# Altium PCB {TEX137}_F2837x_controlCARD_R1.3_PCB_PADS.PcbDoc (part 1 of 6)
Units mil, origin at the board's own origin, x right, y up, seen from the top; angles counter-clockwise.
Board outline 4163.98 x 2011.3 mil, 10 copper layers (Primary Side, Inner Layer 2, Inner Layer 3, Inner Layer 4, Inner Layer 5, Inner Layer 6, Inner Layer 7, Inner Layer 8, Inner Layer 9, Secondary Side), stack 103.5 mil thick; 292 components, 317 nets, 1400 pads, 1032 vias.
Unrouted connection lines stored in the file: 106.
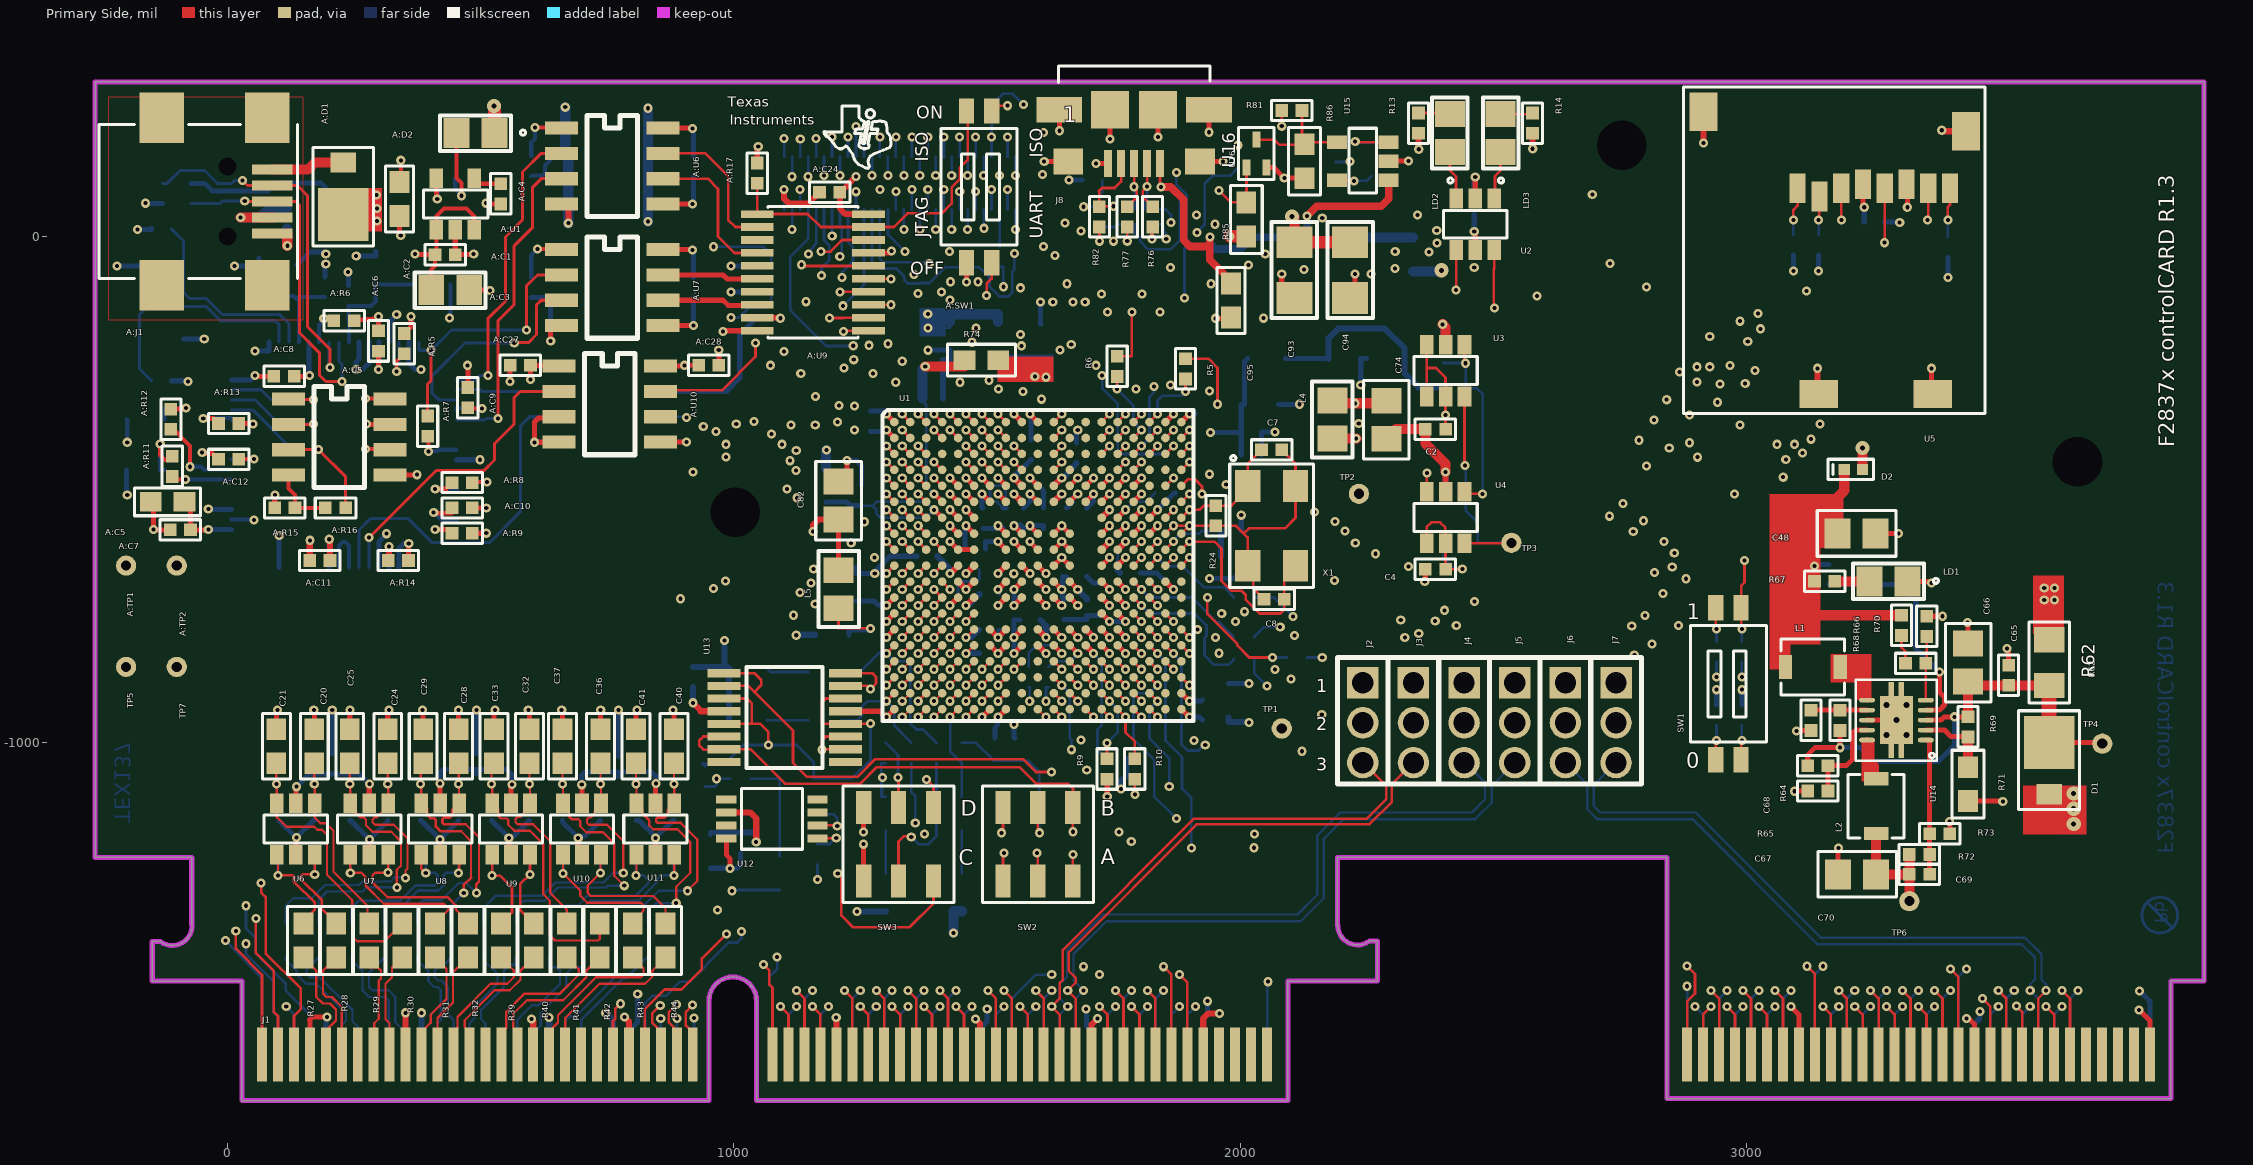
[diagram p0: Primary Side view]
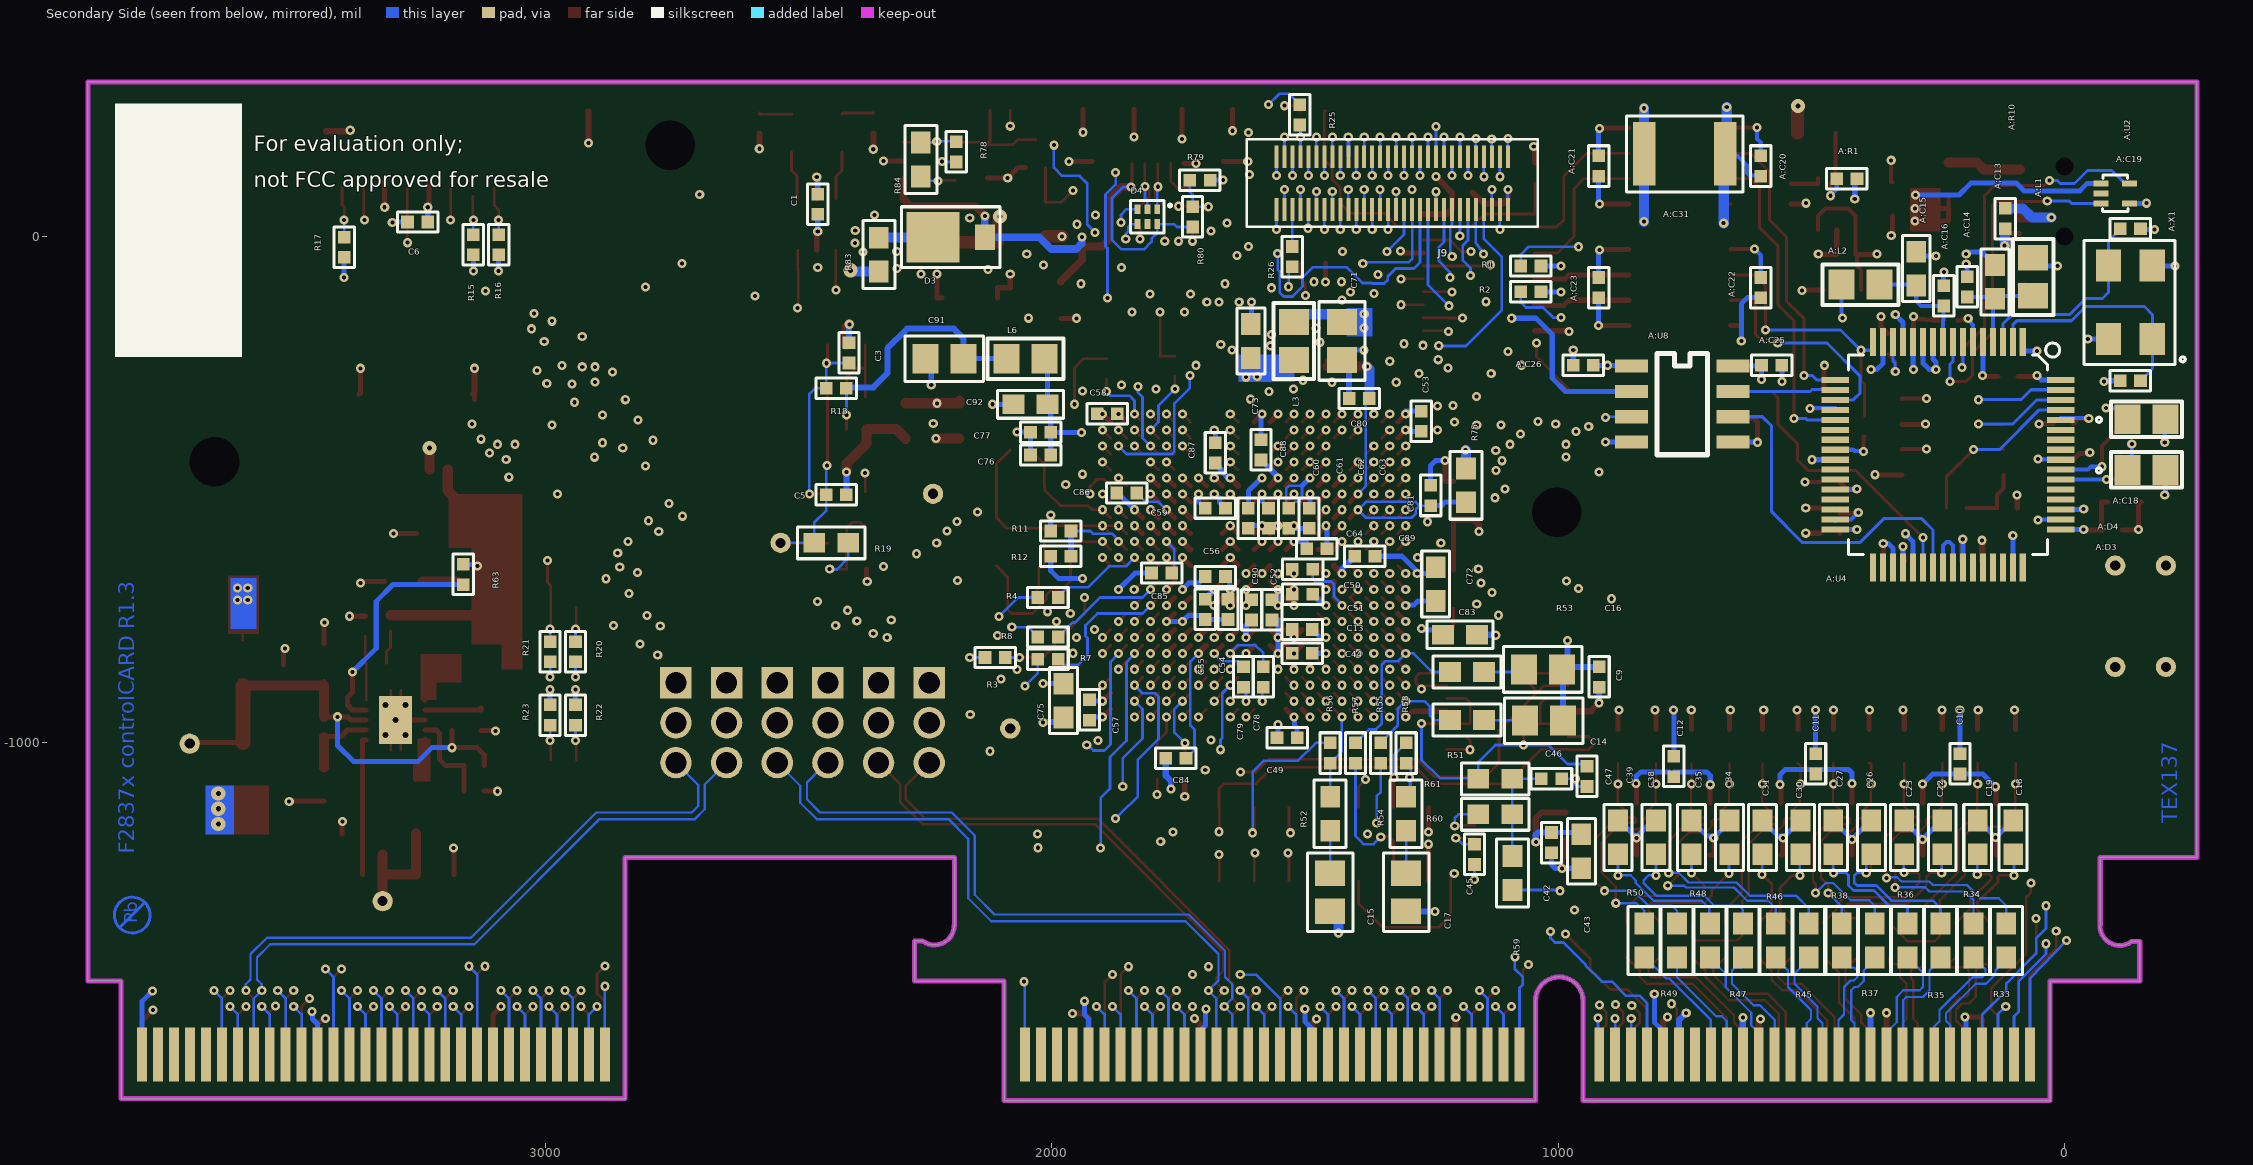
[diagram p1: Secondary Side view, seen from below]
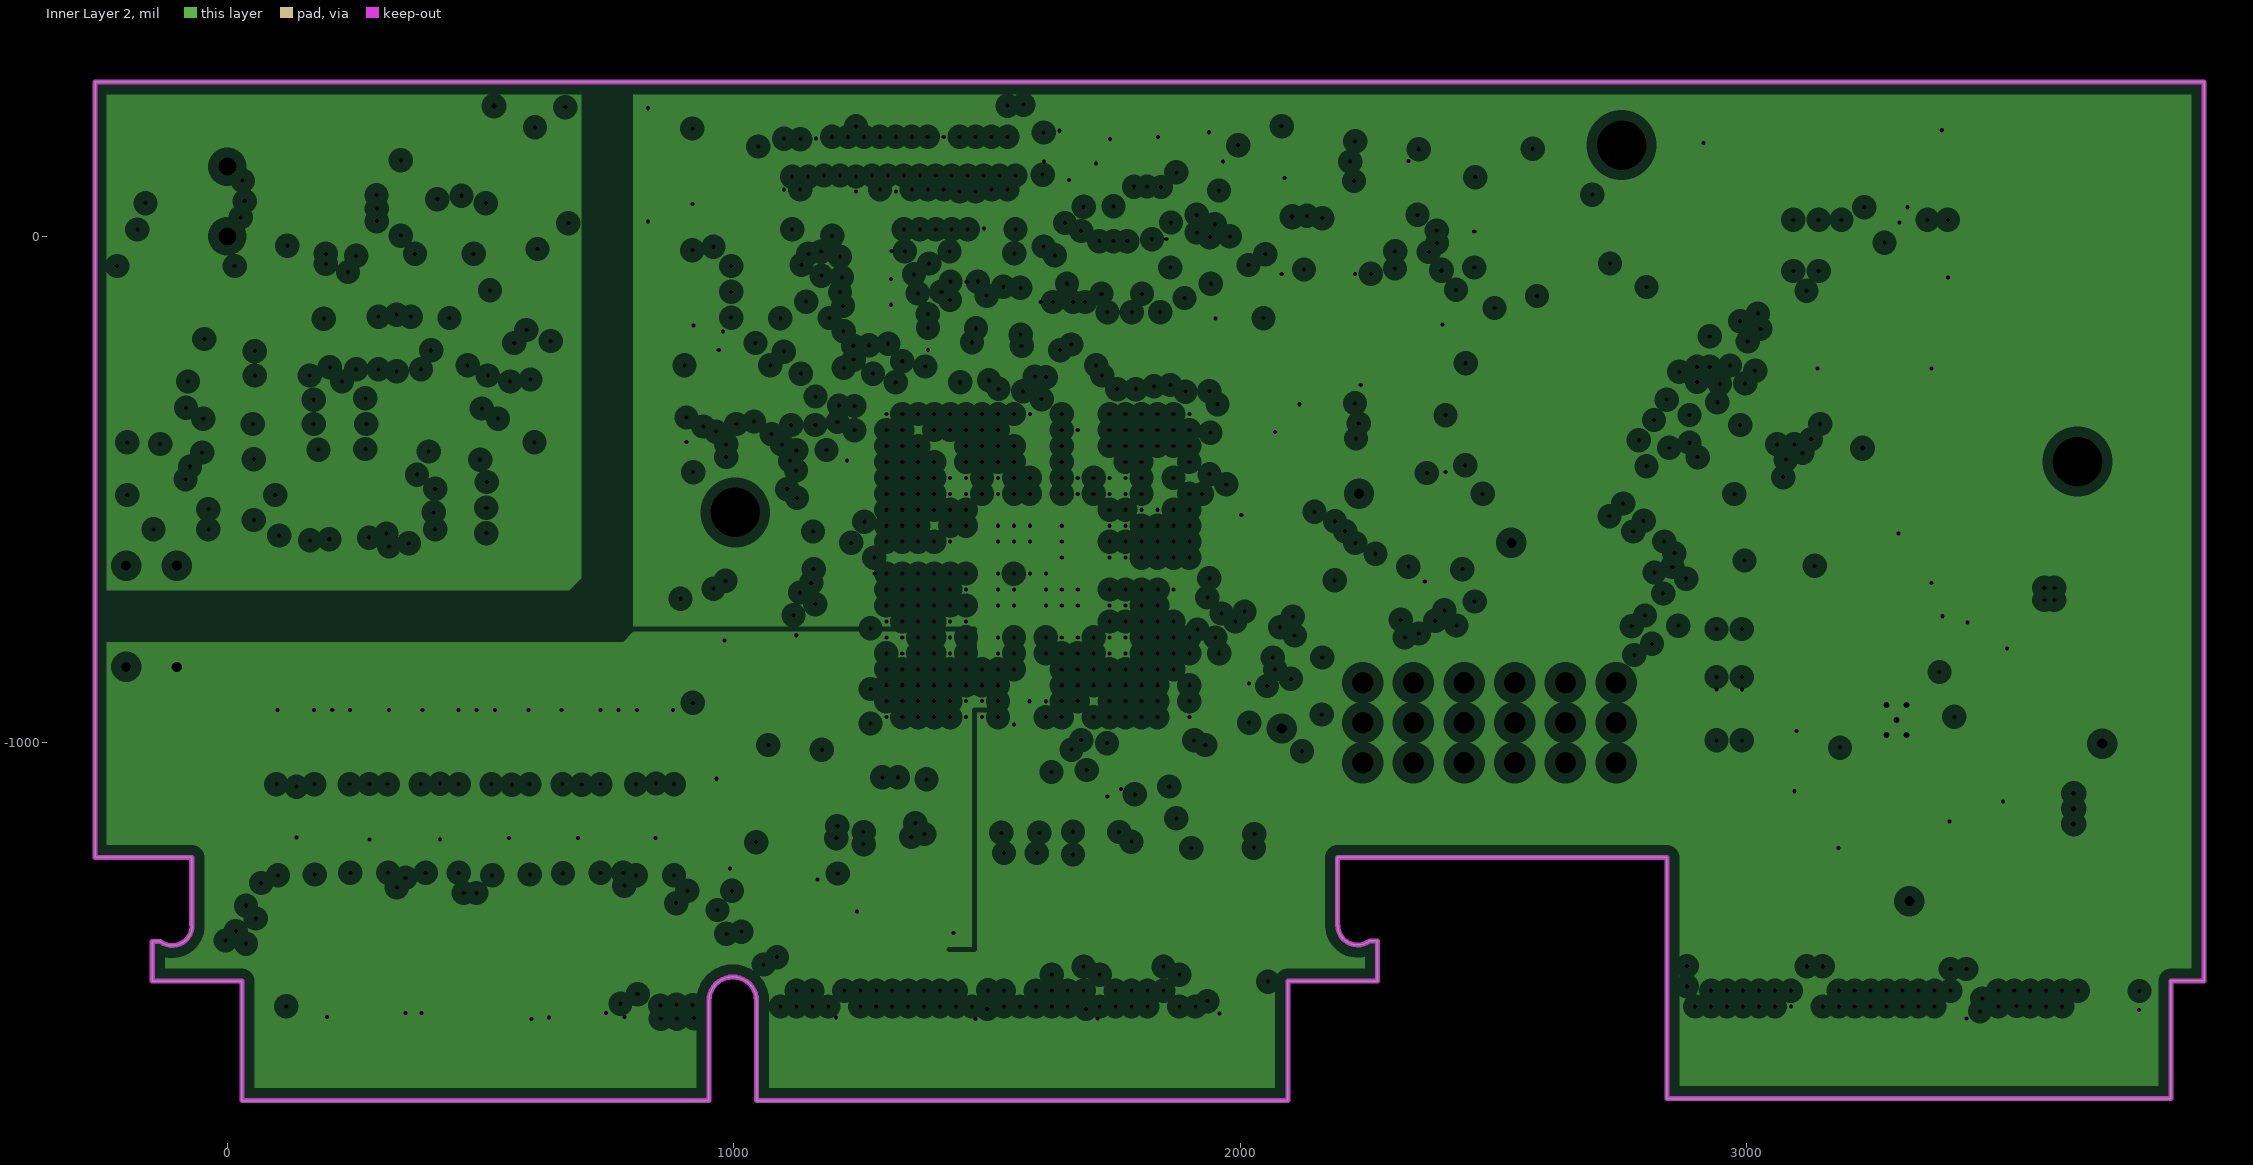
[diagram p2: Inner Layer 2, clearances drawn from the general rule]
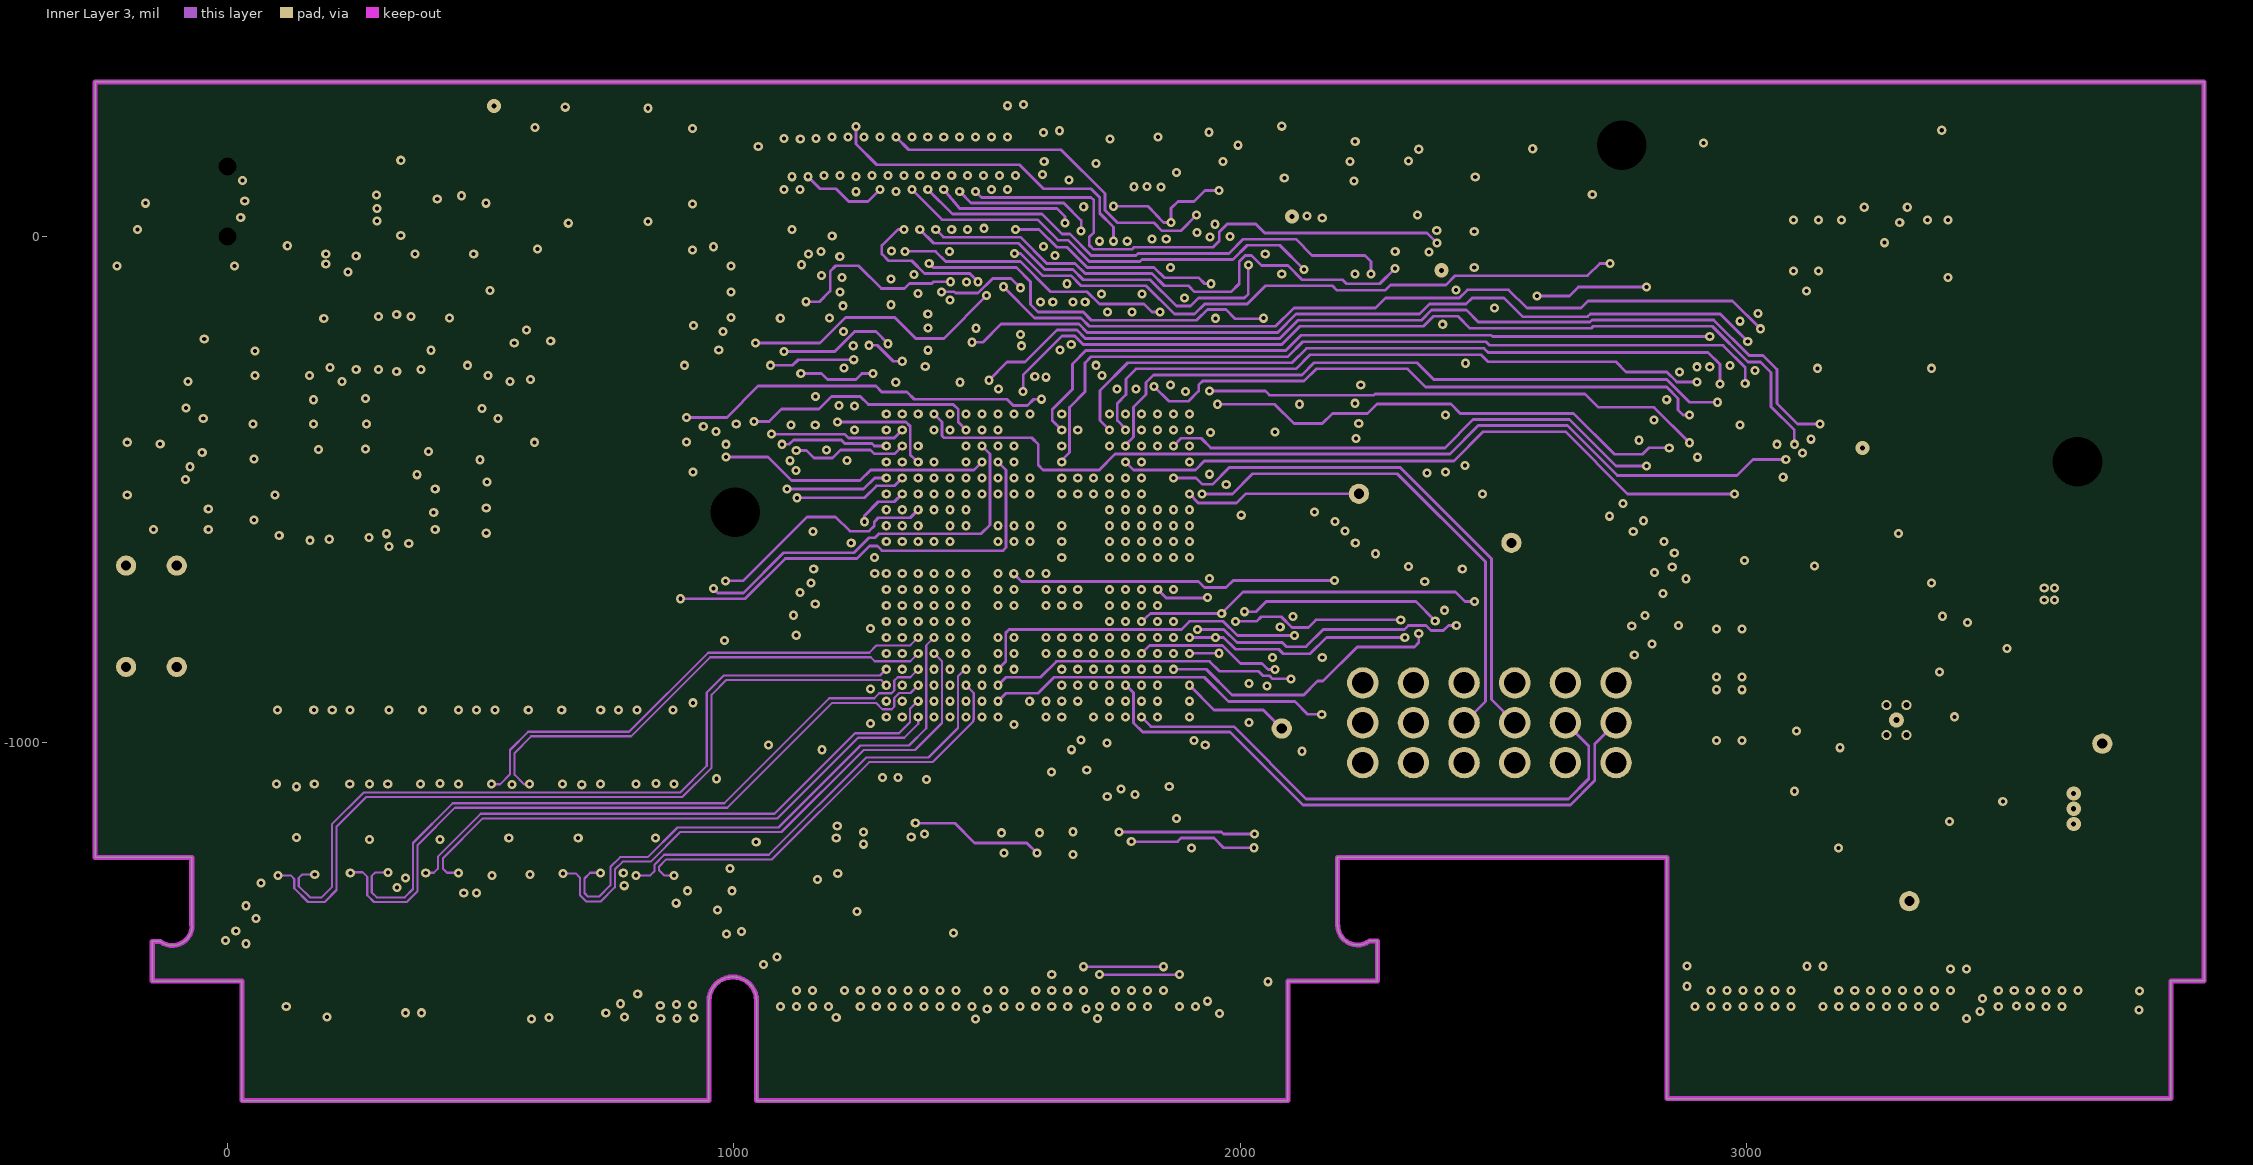
[diagram p3: Inner Layer 3]
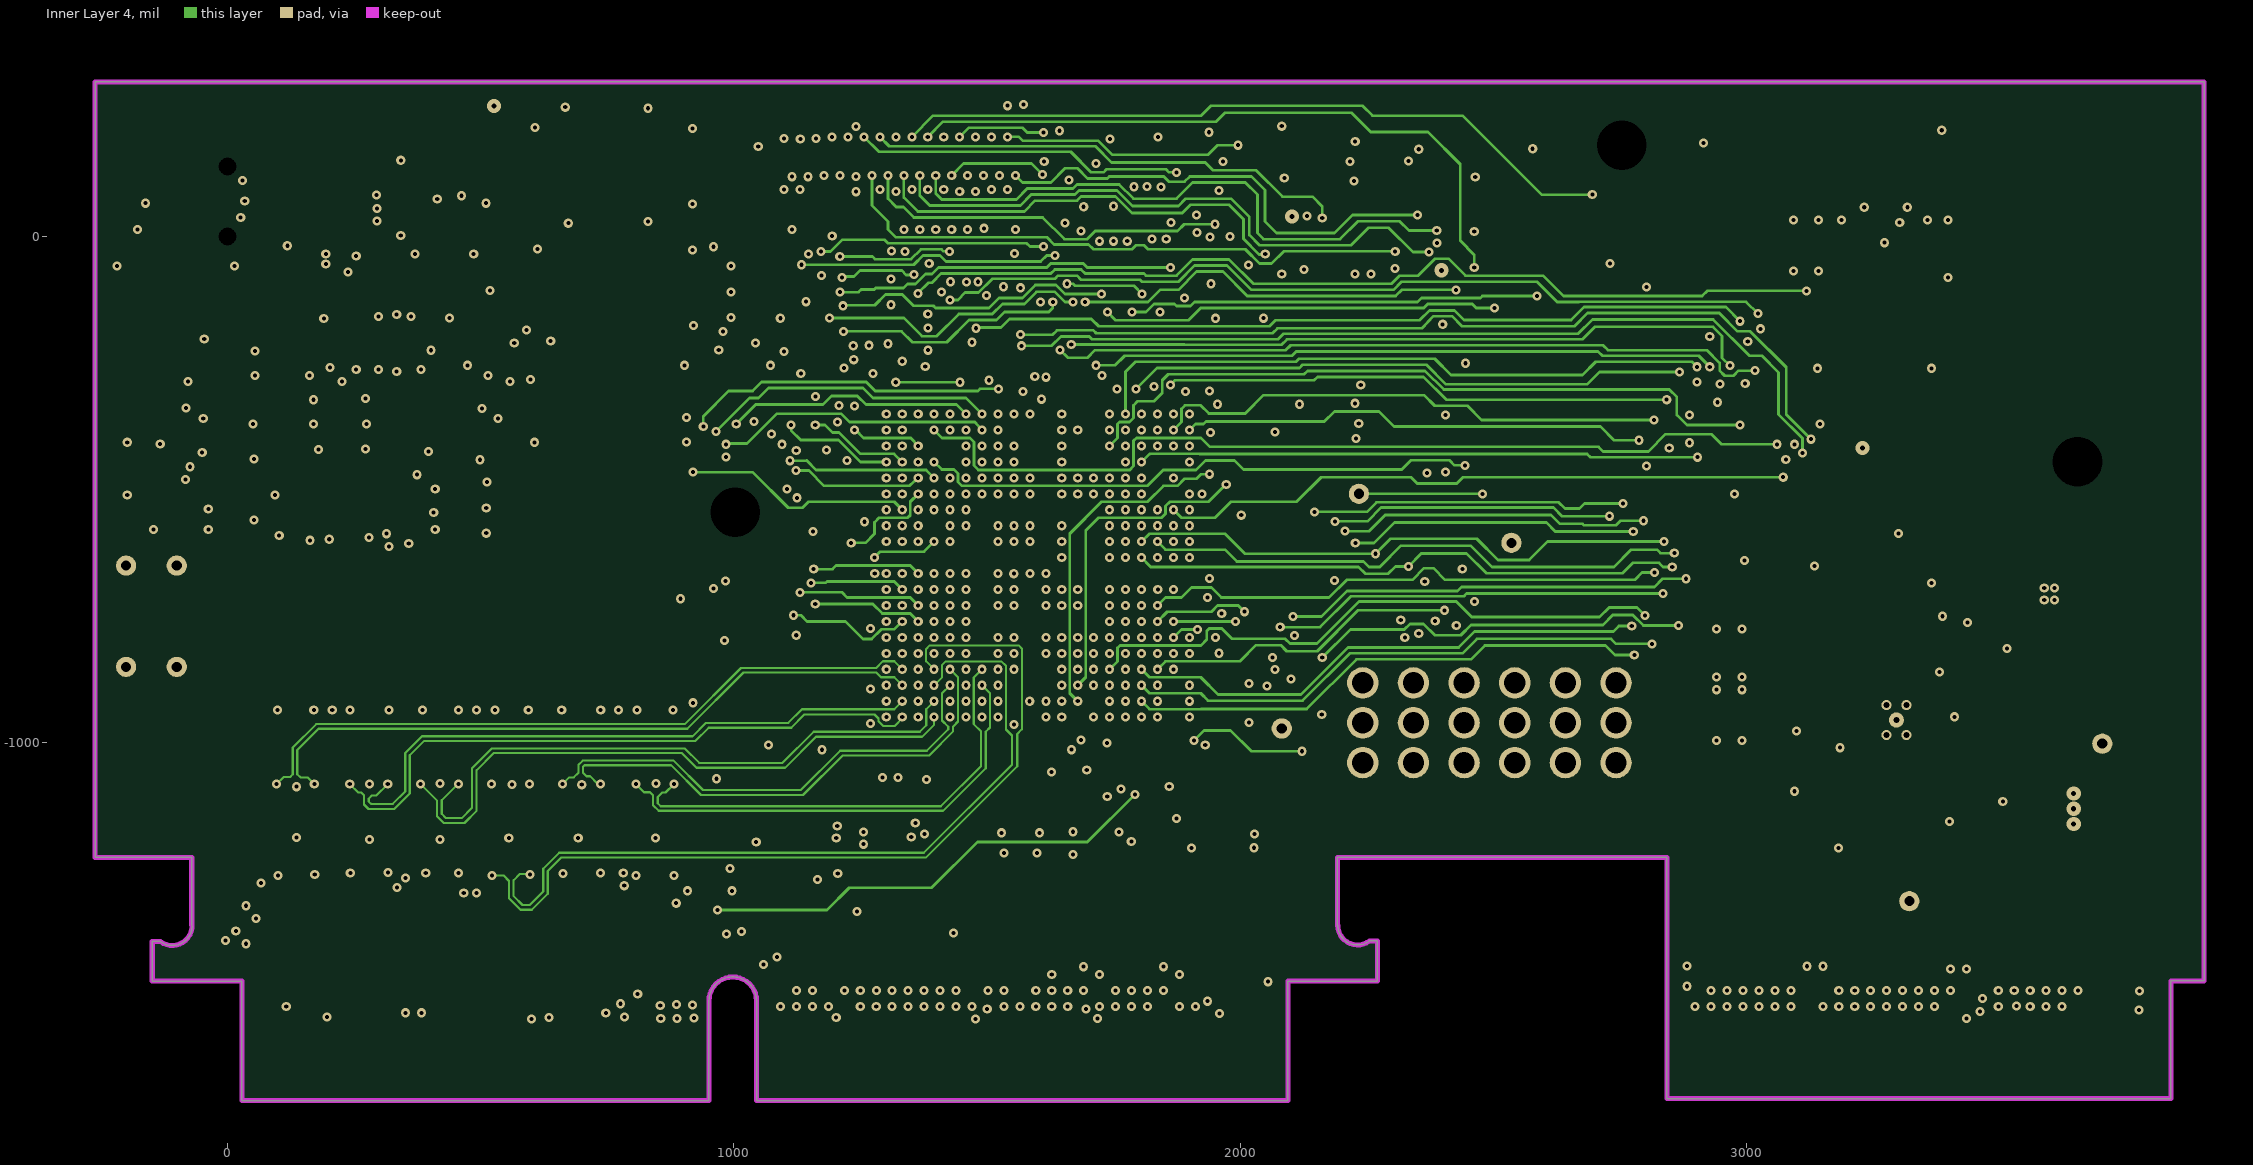
[diagram p4: Inner Layer 4]
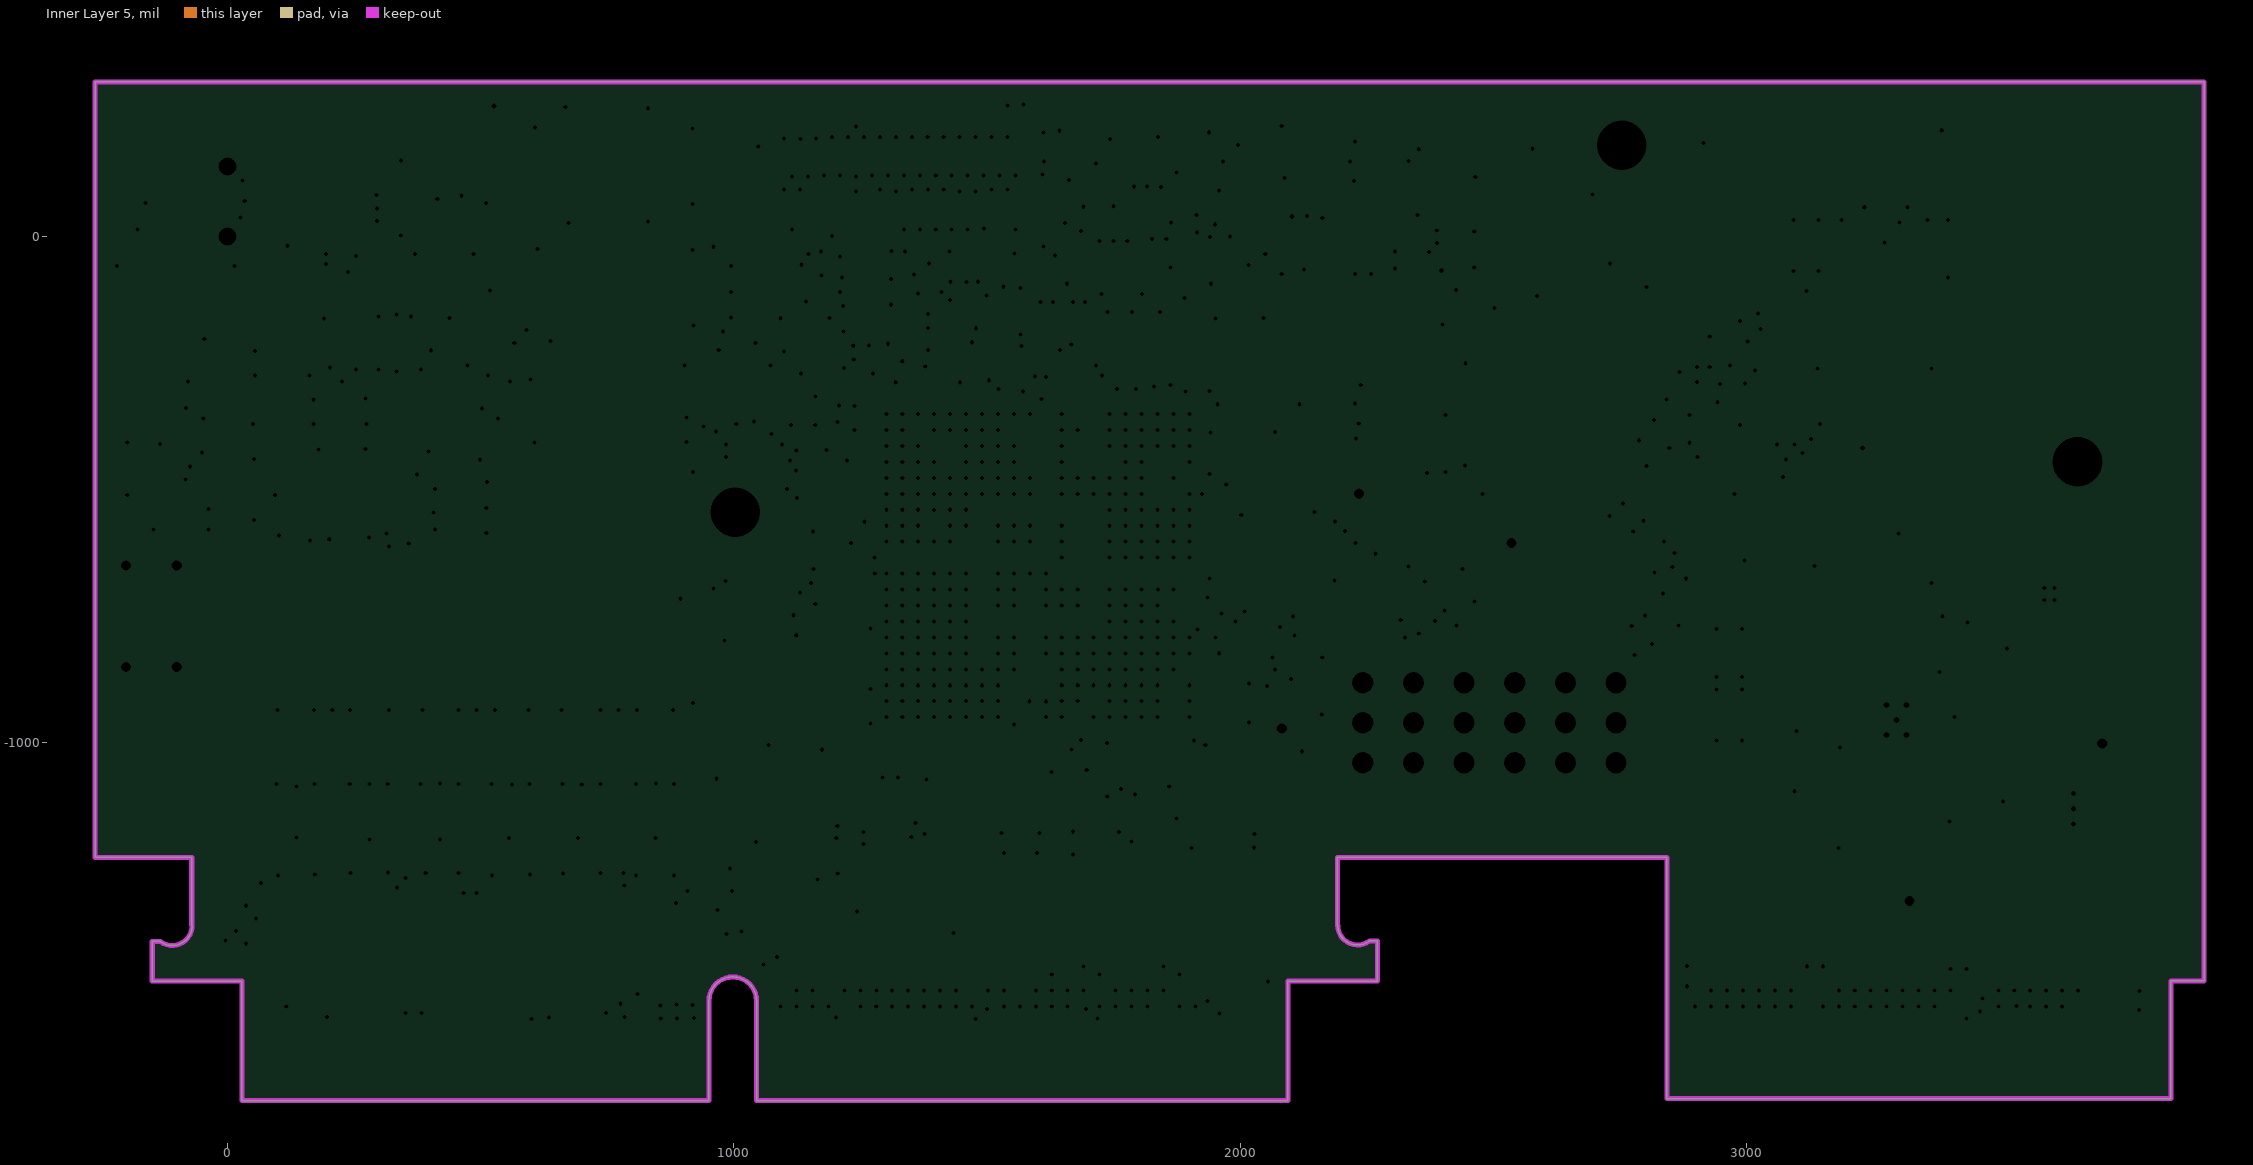
[diagram p5: Inner Layer 5, clearances drawn from the general rule]
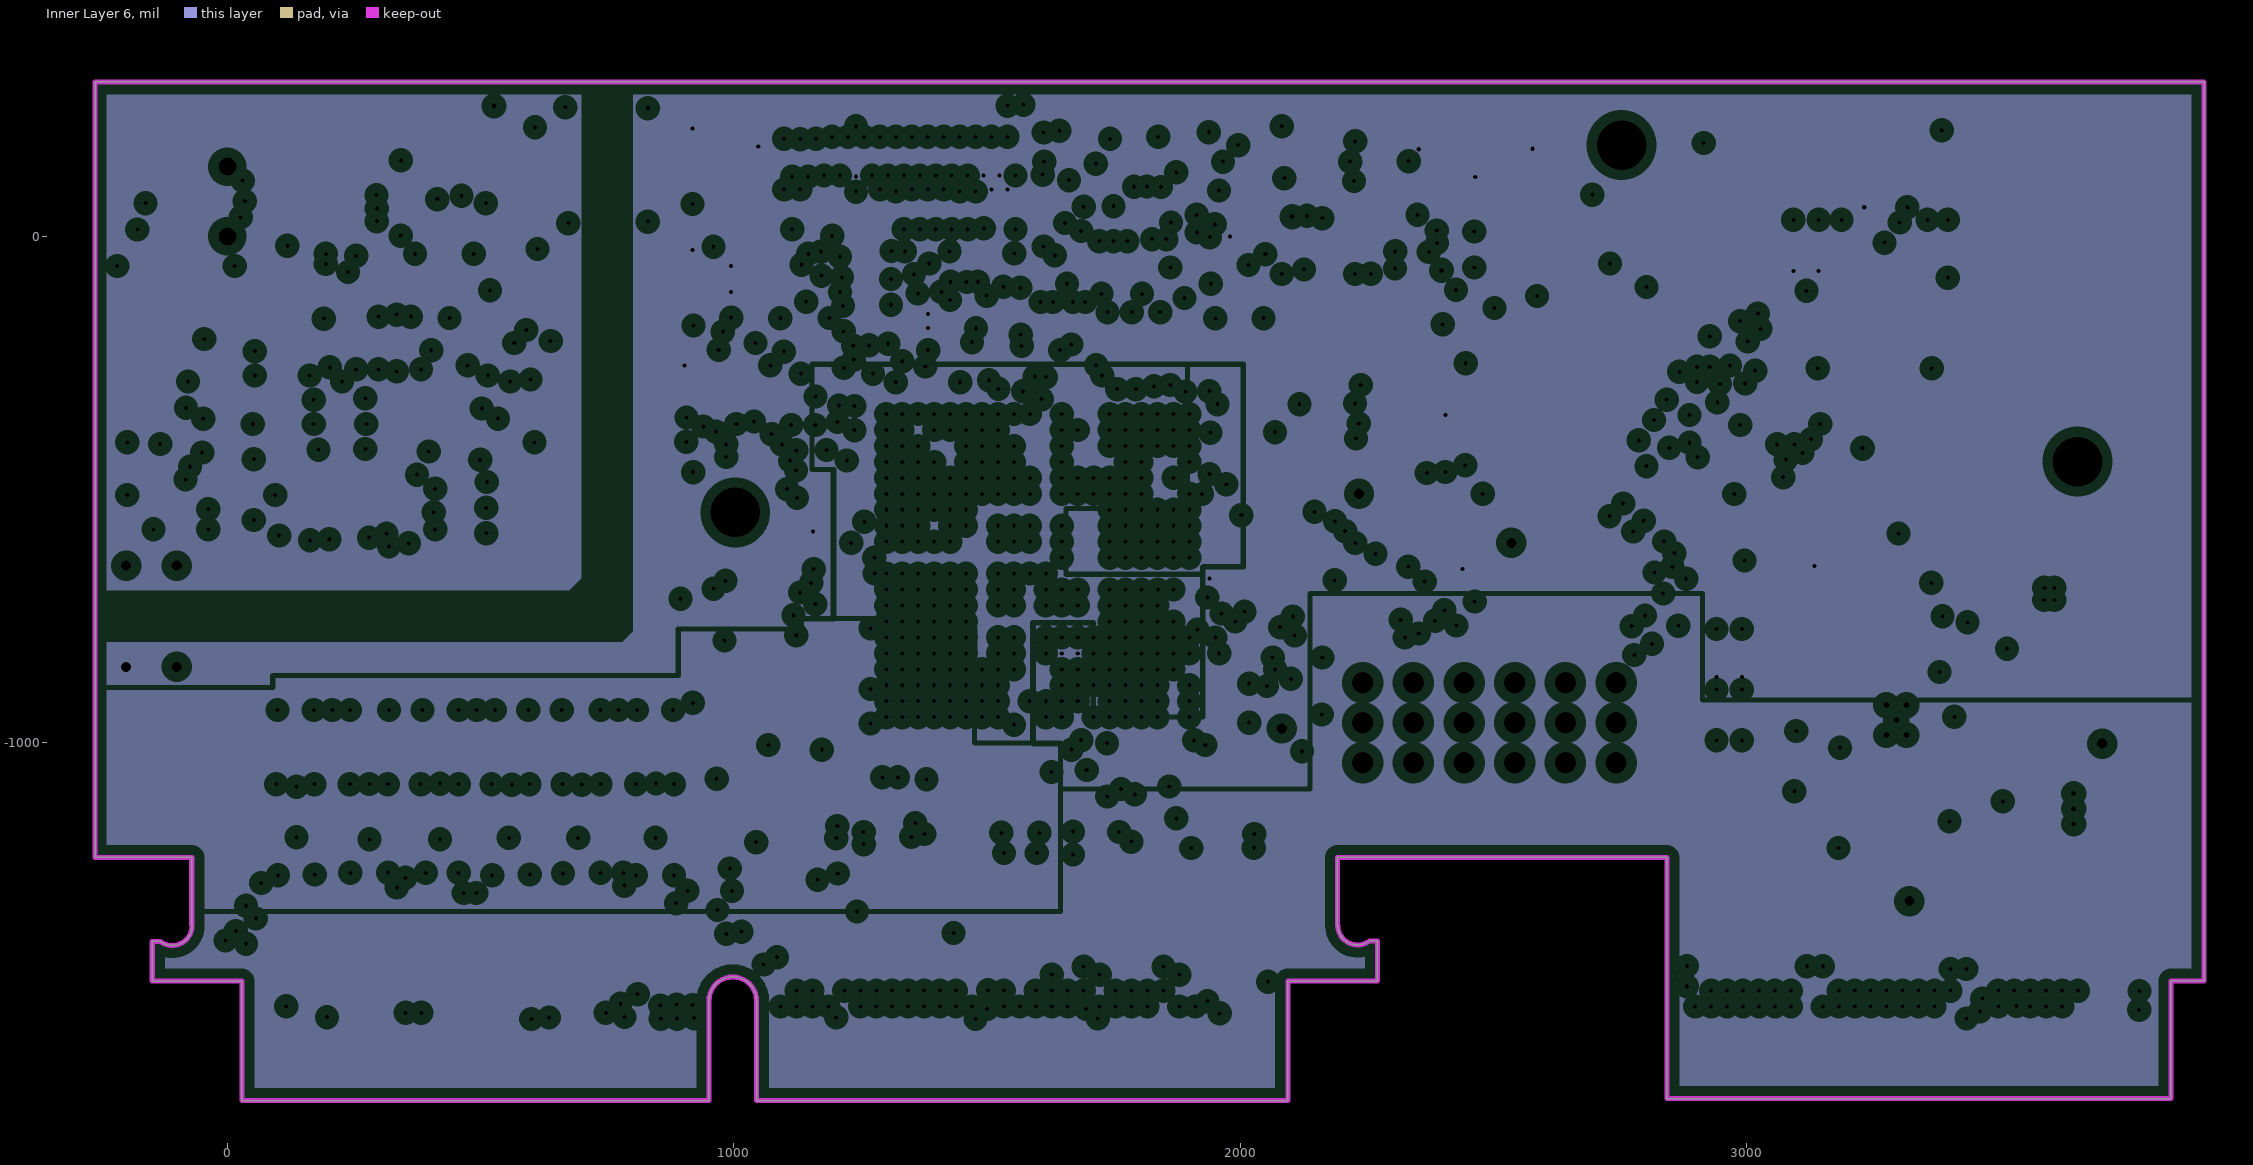
[diagram p6: Inner Layer 6, clearances drawn from the general rule]
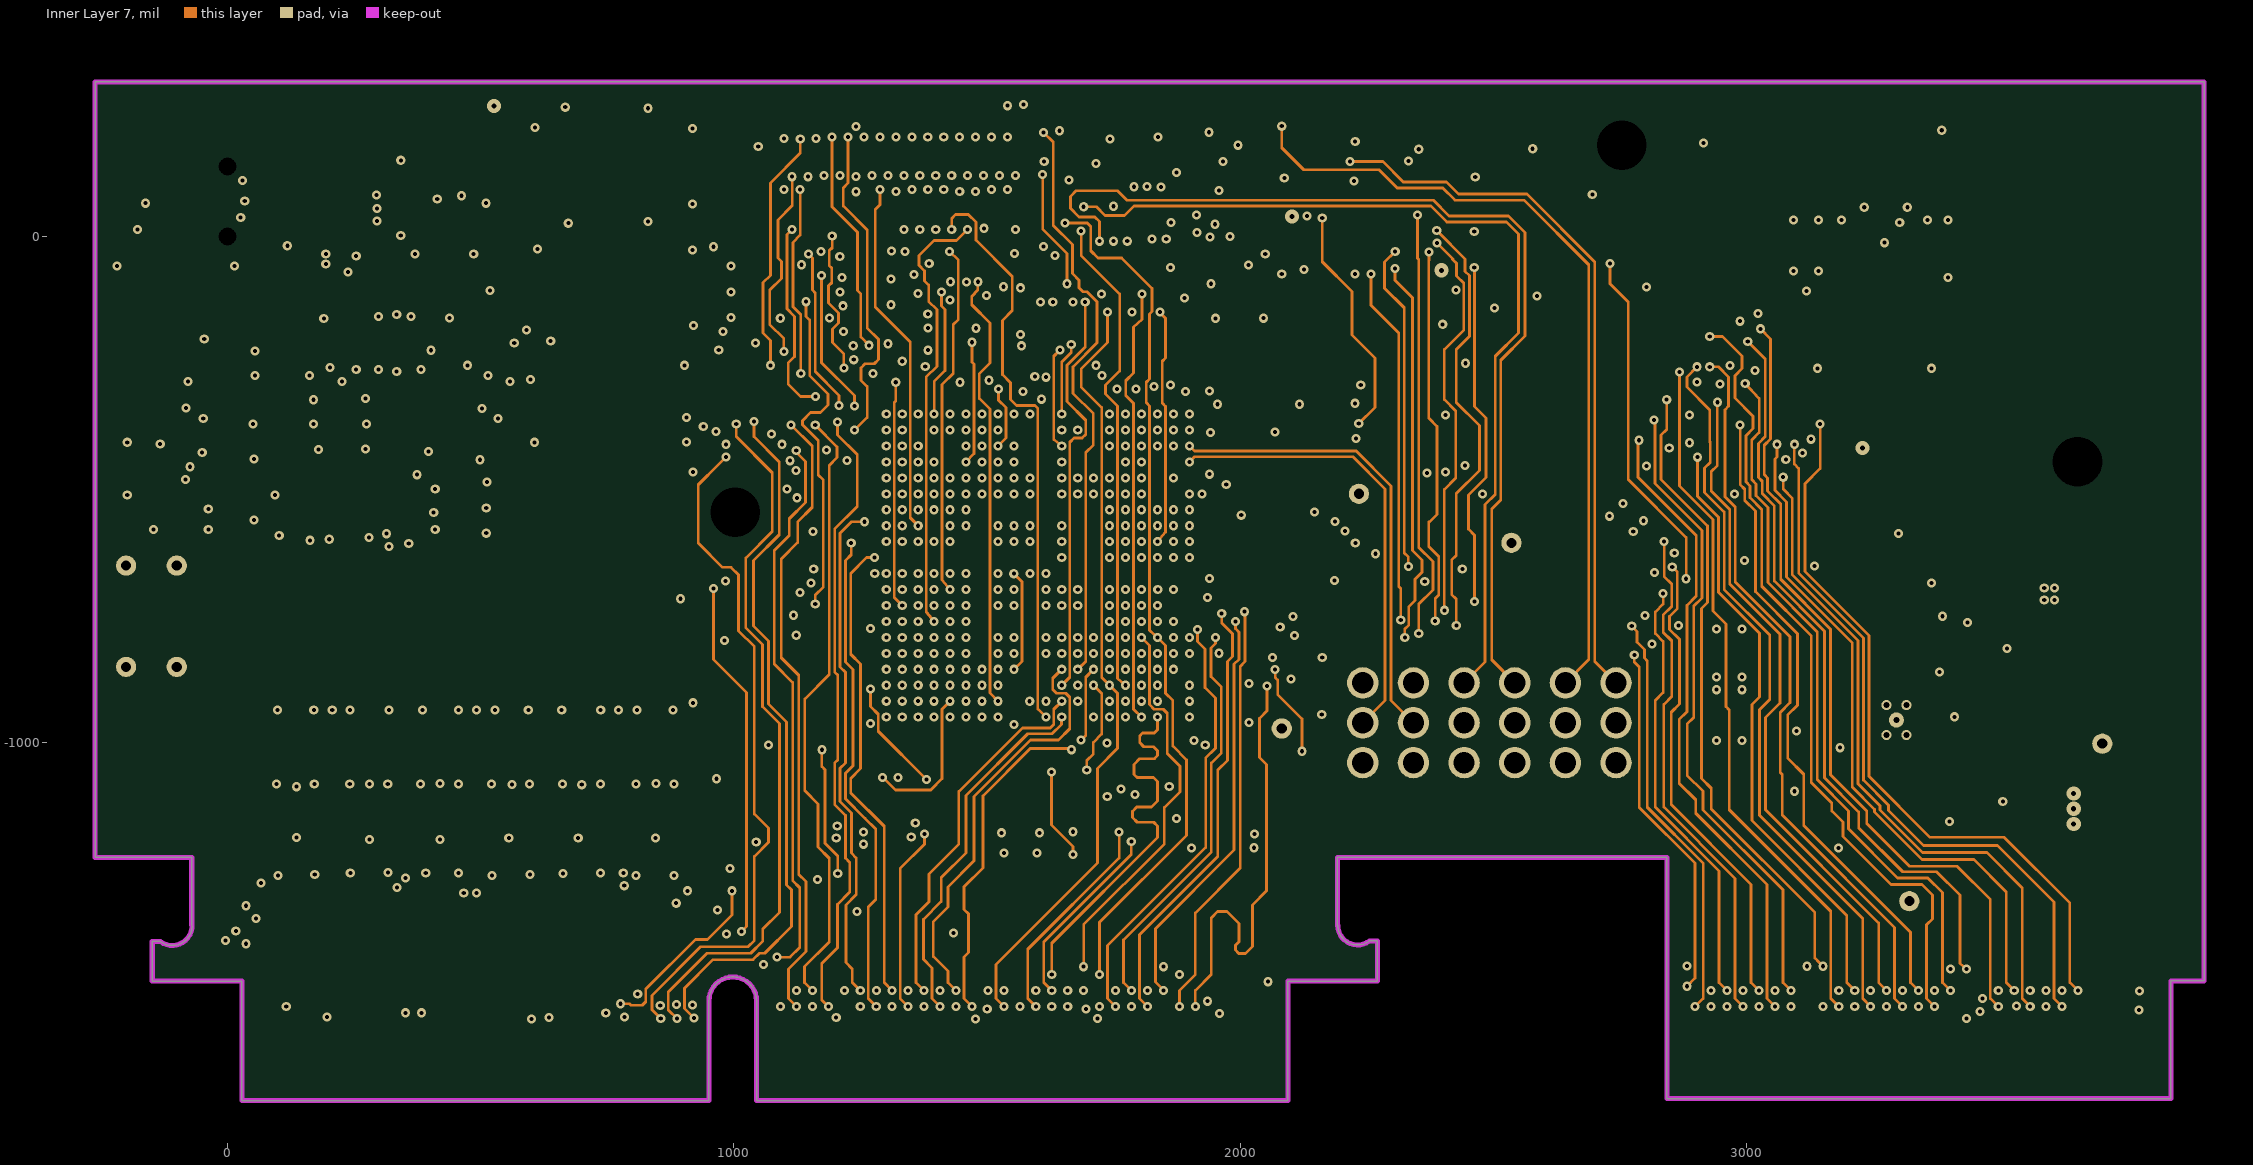
[diagram p7: Inner Layer 7]
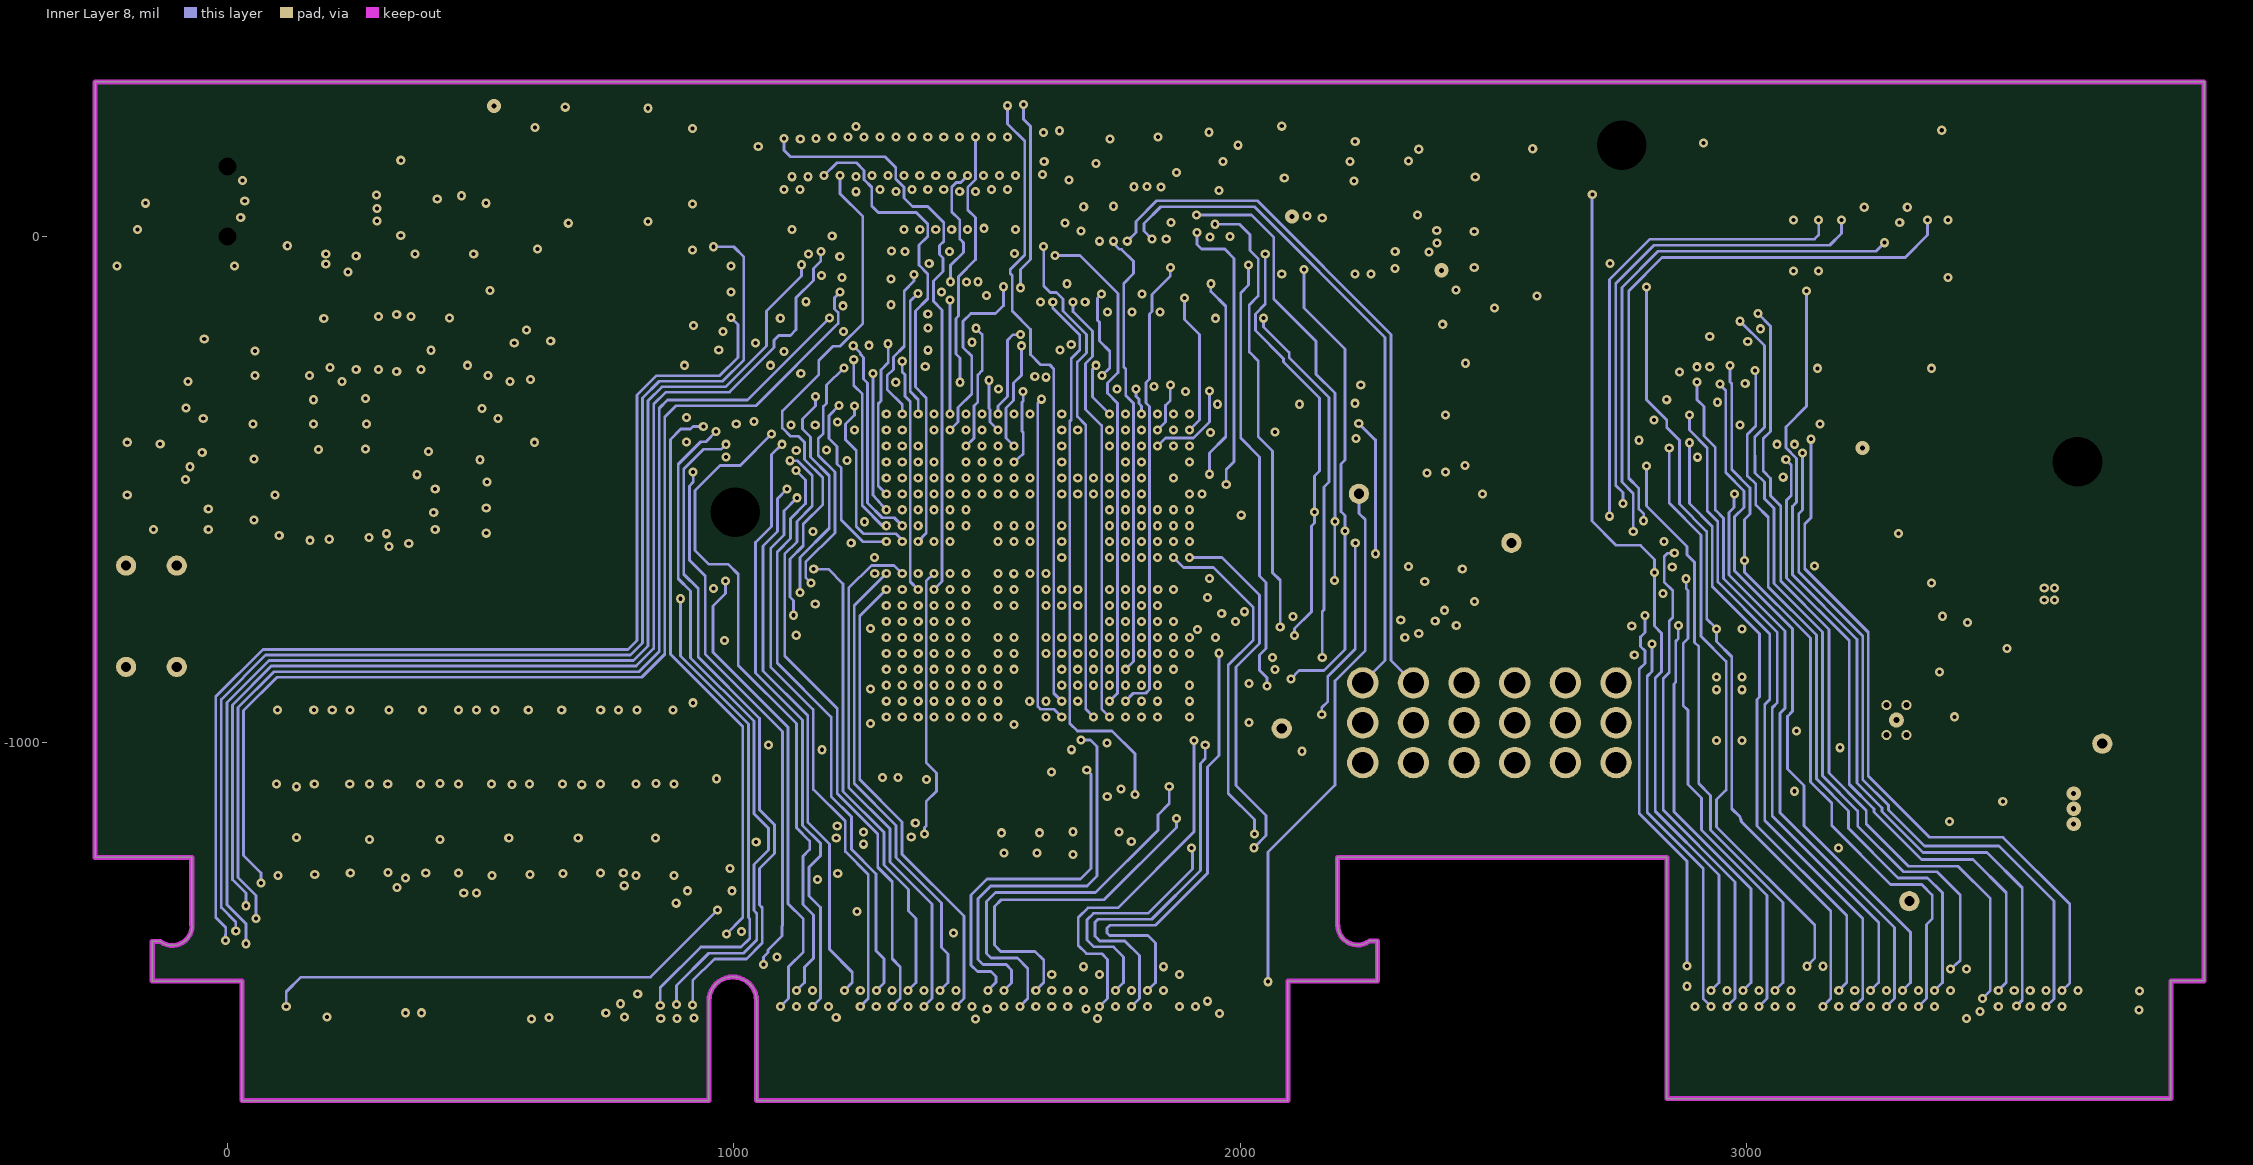
[diagram p8: Inner Layer 8]
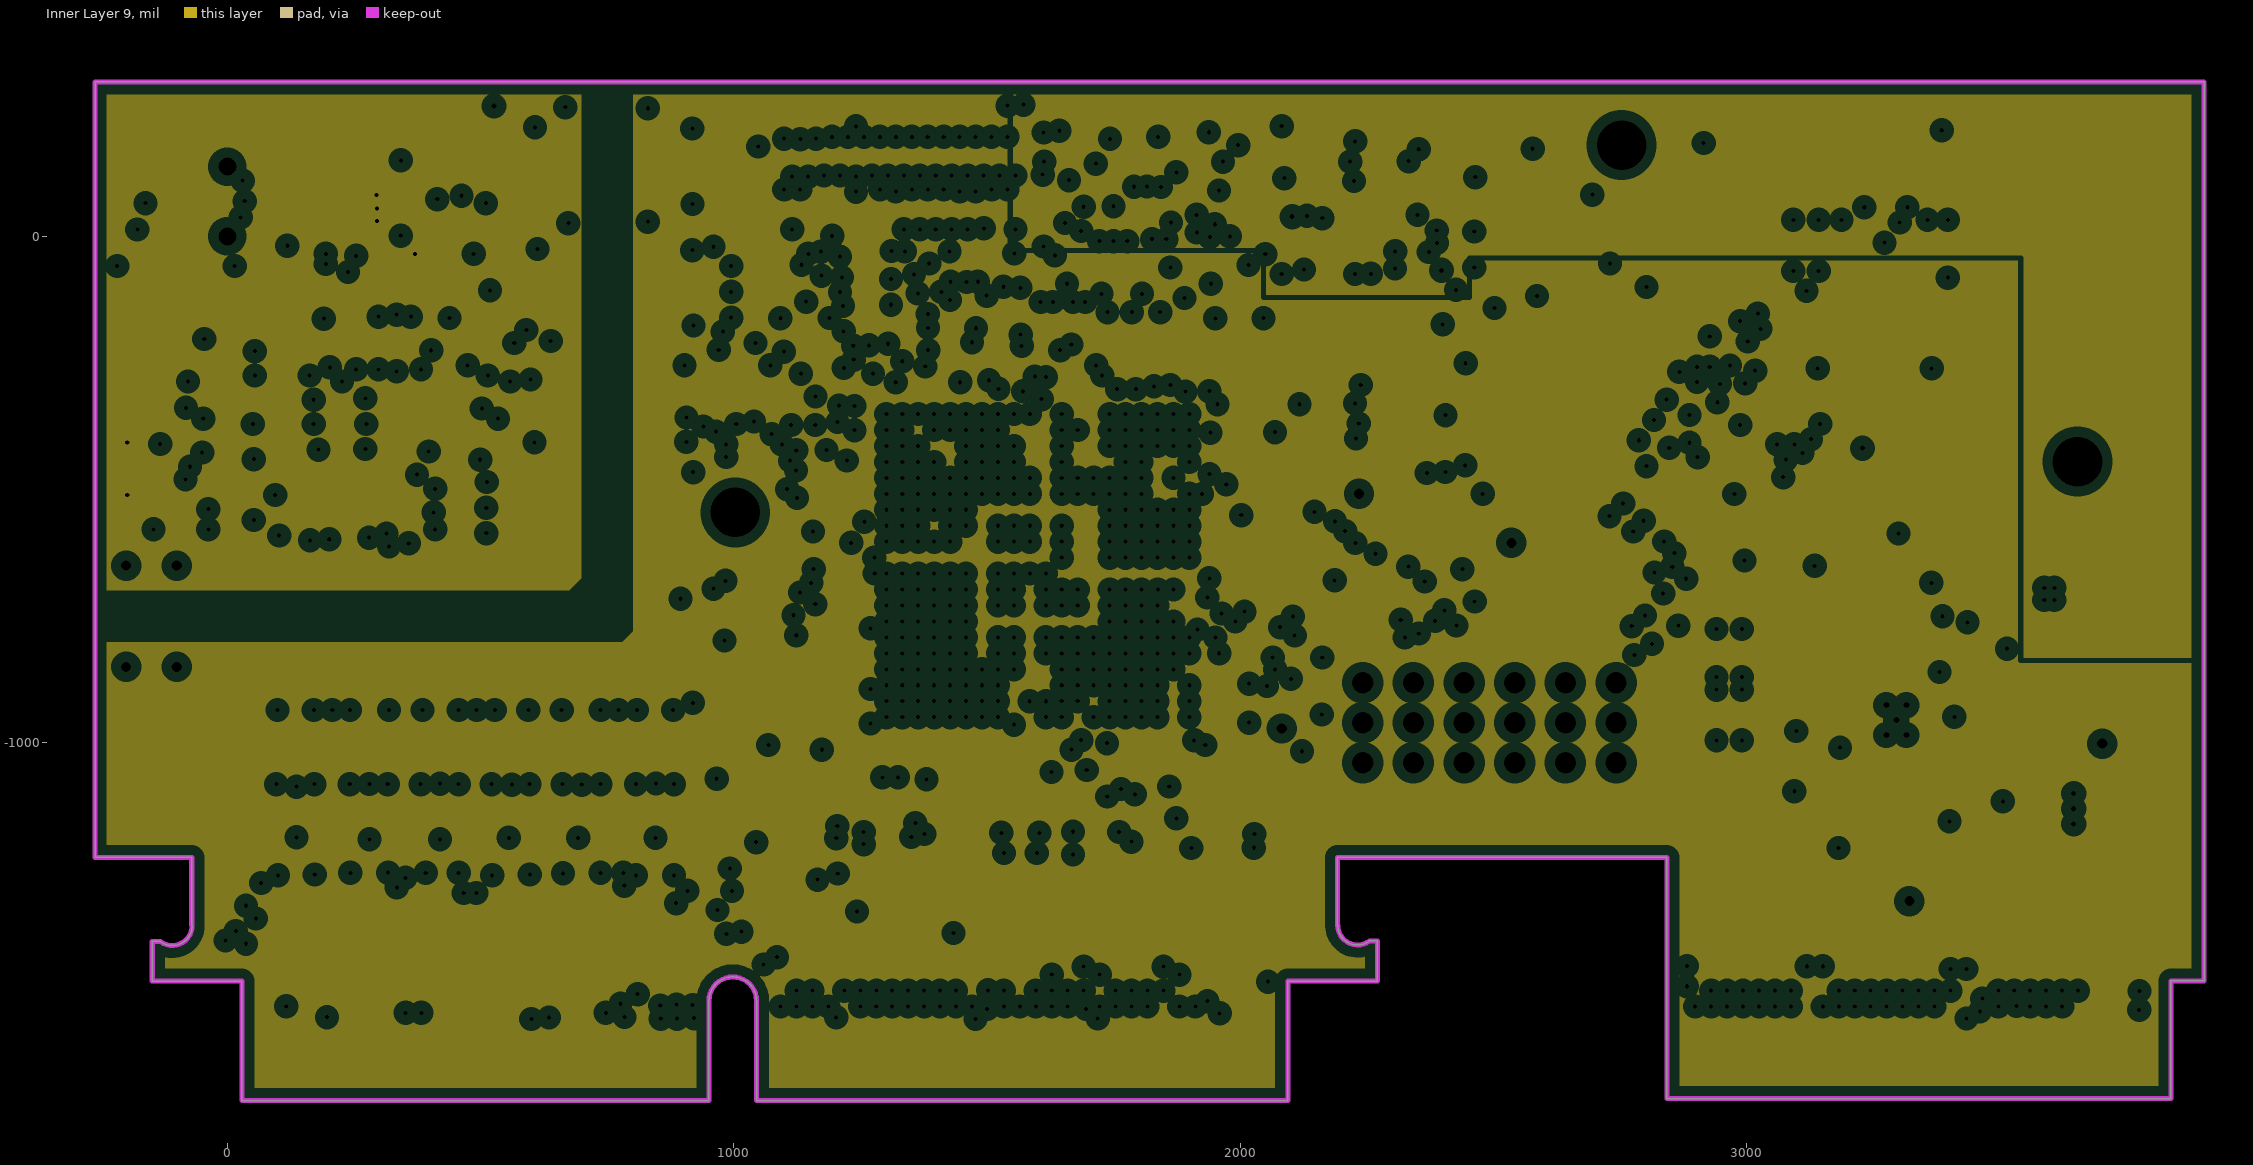
[diagram p9: Inner Layer 9, clearances drawn from the general rule]

## Layer stack, top to bottom
Primary Mask Pad Clearance: solder mask 0.4, Solder Resist, Dk 3.5
Primary Side: signal copper 1.35
Dielectric 1: dielectric 10, FR-4, Dk 4.3
Inner Layer 2: plane copper 1.35, net GND
Dielectric2: dielectric 10, FR-4, Dk 4.3
Inner Layer 3: signal copper 1.35
Dielectric3: dielectric 10, FR-4, Dk 4.3
Inner Layer 4: signal copper 1.35
Dielectric4: dielectric 10, FR-4, Dk 4.3
Inner Layer 5: plane copper 1.35
Dielectric5: dielectric 10, FR-4, Dk 4.3
Inner Layer 6: plane copper 1.35, net VDD_3V3
Dielectric6: dielectric 10, FR-4, Dk 4.3
Inner Layer 7: signal copper 1.35
Dielectric7: dielectric 10, FR-4, Dk 4.3
Inner Layer 8: signal copper 1.35
Dielectric8: dielectric 10, FR-4, Dk 4.3
Inner Layer 9: plane copper 1.35, net EMU_5V0
Dielectric9: dielectric 10, FR-4, Dk 4.3
Secondary Side: signal copper 1.35
Secondary Mask Pad Clearance: solder mask 0.4, Solder Resist, Dk 3.5

## Board outline
28.56,-1706.1 950.67,-1706.1 950.67,-1509.1 cw(c997.67,-1509.1) 1044.67,-1509.1 1044.67,-1706.1 2093.56,-1706.1 2093.56,-1470.1 2270.56,-1470.1 2270.56,-1391.1 2254.56,-1391.1 2254.59,-1391.08 cw(c2231.06,-1359.98) 2192.06,-1360.1 2191.56,-1360.1 2191.56,-1262.51 2191.56,-1226.1 2841.87,-1226.1 2841.87,-1702.1 3837.15,-1702.1 3837.15,-1470 3902.56,-1470 3902.56,305.2 -261.42,305.19 -261.41,-1226.1 -70.44,-1226.1 -70.44,-1359.1 -69.94,-1359.1 -69.94,-1359.11 cw(c-108.89,-1361.01) -132.44,-1392.1 -148.44,-1392.1 -148.44,-1470.1 28.56,-1470.1

## Design rules (kind name [scope] priority, off if disabled: settings)
Clearance "Clearance - Default - DEFAULT - Via" [IsVia vs IsVia] p1: gap=6 ignorepadtopadclearanceinfootprint=FALSE
Clearance "Clearance - Default - DEFAULT- SMD" [IsVia vs IsSMTPin] p2: gap=6 ignorepadtopadclearanceinfootprint=FALSE
Clearance "Clearance - Default - DEFAULT - Net" [All] p3: gap=8 ignorepadtopadclearanceinfootprint=FALSE except(0: Arc-Hole Track-Hole SMDPad-Hole THPad-Hole Via-Hole Fill-Hole Poly-Hole Region-Hole Text-Hole; 4: Arc-SMDPad Arc-THPad Arc-Via Arc-Text Track-SMDPad Track-THPad Track-Via Track-Text SMDPad-SMDPad SMDPad-THPad SMDPad-Via SMDPad-Text THPad-THPad THPad-Via THPad-Text Via-Via Via-Text Fill-Text Poly-Text Region-Text; 4.7: Arc-Arc Arc-Track Track-Track; 10: Text-Text)
ComponentClearance "ComponentClearance - Default - DEFAULT" [All] p1: gap=6 collisioncheckmode=3 verticalgap=10 showdistances=FALSE
FanoutControl Fanout_SOIC [IsSOIC] p1: bgadir=Out bgaviamode=Centered fanoutstyle=Auto fanoutdirection=Alternating viagrid=1 // Fanout_SOIC (Default Rule)
FanoutControl Fanout_BGA [IsBGA] p3: bgadir=Out bgaviamode=Centered fanoutstyle=Auto fanoutdirection=Alternating viagrid=1 // Fanout_BGA (Default Rule)
HoleToHoleClearance "HoleToHoleClearance - Default - DEFAULT" [All] p1: gap=6 allowstackedmicrovias=TRUE
Length "Default Length" [All] p1: maxlimit=50000 minlimit=0
MaxMinImpedance "Default Impedance" [All] p1: minimum=50.00 maximum=150.0
ParallelSegment "Default Parallel Segment Same Layer" [All] p1: limit=1000 gap=200
ParallelSegment "Default Parallel Segment Adjasent" [All] p2: limit=1000 gap=200
PlaneClearance "PlaneClearance - FootPrint 'CONN_USB_B_MINI_FEMALE'" [HasFootprint('CONN_USB_B_MINI_FEMALE')] p1: clearance=17 // PAD - Power Plane Clearance
PlaneClearance "PlaneClearance - FootPrint 'DF40C-60DP-0.4V'" [HasFootprint('DF40C-60DP-0.4V')] p2: clearance=41 // PAD - Power Plane Clearance
PlaneClearance "PlaneClearance - FootPrint 'VIA_20_40'" [HasFootprint('VIA_20_40')] p3: clearance=15 // PAD - Power Plane Clearance
PlaneClearance "PlaneClearance - FootPrint 'TI_DRC_10'" [HasFootprint('TI_DRC_10')] p4: clearance=8 // PAD - Power Plane Clearance
PlaneClearance "PlaneClearance - FootPrint 'HDR1X3_2MM'" [HasFootprint('HDR1X3_2MM')] p5: clearance=20 // PAD - Power Plane Clearance
PlaneConnect "PlaneConnect - FootPrint 'VIA_20_40'" [HasFootprint('VIA_20_40')] p1: planeconnectstyle=Relief reliefexpansion=10 reliefentries=4 reliefconductorwidth=15 reliefairgap=10
PlaneConnect "PlaneConnect - FootPrint 'TI_DRC_10'_11" [HasFootprint('TI_DRC_10')] p2: planeconnectstyle=Direct reliefexpansion=4 reliefentries=4 reliefconductorwidth=12 reliefairgap=0
PlaneConnect "PlaneConnect - FootPrint 'TI_DRC_10'" [HasFootprint('TI_DRC_10')] p3: planeconnectstyle=Direct reliefexpansion=4 reliefentries=4 reliefconductorwidth=15 reliefairgap=0
PlaneConnect "PlaneConnect - FootPrint 'HDR1X3_2MM'_7" [HasFootprint('HDR1X3_2MM')] p4: planeconnectstyle=Relief reliefexpansion=10 reliefentries=4 reliefconductorwidth=15 reliefairgap=7.5
PlaneConnect "PlaneConnect - FootPrint 'HDR1X3_2MM'" [HasFootprint('HDR1X3_2MM')] p5: planeconnectstyle=Relief reliefexpansion=10 reliefentries=4 reliefconductorwidth=15 reliefairgap=7.5
PlaneConnect "PlaneConnect - FootPrint 'TI_DRC_10'_9" [HasFootprint('TI_DRC_10')] p6: planeconnectstyle=Direct reliefexpansion=4 reliefentries=4 reliefconductorwidth=12 reliefairgap=0
PlaneConnect "PlaneConnect - FootPrint 'TI_DRC_10'_10" [HasFootprint('TI_DRC_10')] p7: planeconnectstyle=Direct reliefexpansion=4 reliefentries=4 reliefconductorwidth=12 reliefairgap=0
PlaneConnect "PlaneConnect - FootPrint 'TI_DRC_10'_8" [HasFootprint('TI_DRC_10')] p8: planeconnectstyle=Direct reliefexpansion=4 reliefentries=4 reliefconductorwidth=12 reliefairgap=0
PlaneConnect "Default PlaneConnect" [All] p9: planeconnectstyle=Direct reliefexpansion=20 reliefentries=4 reliefconductorwidth=15 reliefairgap=10
PolygonConnect "PolygonConnect - FootPrint 'VIA_20_40'" [HasFootprint('VIA_20_40')] p1: connectstyle=Relief reliefconductorwidth=15 reliefentries=4 polygonreliefangle="45 Angle" airgapwidth=10
PolygonConnect "PolygonConnect - FootPrint 'TI_DRC_10'_6" [HasFootprint('TI_DRC_10')] p2: connectstyle=Direct reliefconductorwidth=12 reliefentries=4 polygonreliefangle="45 Angle" airgapwidth=10
PolygonConnect "PolygonConnect - FootPrint 'TI_DRC_10'_5" [HasFootprint('TI_DRC_10')] p3: connectstyle=Direct reliefconductorwidth=12 reliefentries=4 polygonreliefangle="45 Angle" airgapwidth=10
PolygonConnect "PolygonConnect - FootPrint 'HDR1X3_2MM'_2" [HasFootprint('HDR1X3_2MM')] p4: connectstyle=Relief reliefconductorwidth=15 reliefentries=4 polygonreliefangle="45 Angle" airgapwidth=7.5
PolygonConnect "PolygonConnect - FootPrint 'HDR1X3_2MM'" [HasFootprint('HDR1X3_2MM')] p5: connectstyle=Relief reliefconductorwidth=15 reliefentries=4 polygonreliefangle="45 Angle" airgapwidth=7.5
PolygonConnect "PolygonConnect - Default SMT" [IsSMTPin] p6: connectstyle=Relief reliefconductorwidth=10 reliefentries=4 polygonreliefangle="45 Angle" airgapwidth=10
PolygonConnect "PolygonConnect - FootPrint 'TI_DRC_10'_4" [HasFootprint('TI_DRC_10')] p7: connectstyle=Direct reliefconductorwidth=12 reliefentries=4 polygonreliefangle="45 Angle" airgapwidth=10
PolygonConnect "PolygonConnect - FootPrint 'TI_DRC_10'_3" [HasFootprint('TI_DRC_10')] p8: connectstyle=Direct reliefconductorwidth=12 reliefentries=4 polygonreliefangle="45 Angle" airgapwidth=10
PolygonConnect "PolygonConnect - FootPrint 'TI_DRC_10'" [HasFootprint('TI_DRC_10')] p9: connectstyle=Direct reliefconductorwidth=15 reliefentries=4 polygonreliefangle="45 Angle" airgapwidth=10
PolygonConnect "PolygonConnect - Default Pad" [All] p10: connectstyle=Direct reliefconductorwidth=15 reliefentries=4 polygonreliefangle="45 Angle" airgapwidth=10
RoomDefinition "Room: DRW9723688" [All vs False] p1: confinementstyle=ConfineOut formatcopy=TRUE lockcomponents=FALSE outline 1147.67,-626 ccw(c997.67,-626) 997.67,-476 ccw(c997.67,-626) 847.67,-626 ccw(c997.67,-626) 997.67,-776 ccw(c997.67,-626)
RoomDefinition "Room: DRW32993563" [All vs False] p2: confinementstyle=ConfineOut formatcopy=TRUE lockcomponents=FALSE outline 2991,-626 ccw(c2841,-626) 2841,-476 ccw(c2841,-626) 2691,-626 ccw(c2841,-626) 2841,-776 ccw(c2841,-626)
RoutingLayers "RoutingLayers - Default - DEFAULT" [All] p1: top layer_v5=TRUE mid layer 1_v5=TRUE mid layer 2_v5=TRUE mid layer 3_v5=TRUE mid layer 4_v5=TRUE bottom layer_v5=TRUE
RoutingPriority "RoutingPriority - Default - DEFAULT" [All] p1: routingpriority=3
RoutingTopology "Default Routing Topology" [All] p1: topology=Shortest
RoutingVias "RoutingVias - Default - DEFAULT" [All] p1: holewidth=13 width=30 viastyle="Through Hole" minholewidth=13 minwidth=30 maxholewidth=13 maxwidth=30
SMDToCorner "SMDToCorner - Default - DEFAULT" [All] p1: distance=60000
SolderMaskExpansion [All] p1: expansion=4 istentingtop=FALSE
Width "Default Width" [All] p1: maxlimit=200 minlimit=4 preferedwidth=5.3
20 further rules are at their usual default settings.

## Components (designator, comment, footprint, x,y, rotation, side; value= is the part's Value field where it differs from the comment)
A:C1 "C0402" C0402 429.81,-36.1 r180 top
A:C2 "C0603" C0603 339.81,73.9 r90 top
A:C3 "C0805P" C0805P 439.81,-106.1 r0 top
A:C4 "C0402" C0402 539.81,83.9 r90 top
A:C5 "C0603" C0603 -118,-524 r0 top
A:C6 "C0402" C0402 298.24,-206.51 r270 top
A:C7 "C0402" C0402 -92.96,-579.43 r0 top
A:C8 "C0402" C0402 111.77,-276.28 r180 top
A:C9 "C0402" C0402 474.69,-318.23 r270 top
A:C10 "C0402" C0402 463.42,-536.1 r180 top
A:C11 "C0402" C0402 182.56,-639.81 r0 top
A:C12 "C0402" C0402 2.24,-440.28 r0 top
A:C13 "C0603" C0603 137.28,-89.81 r270 bottom
A:C14 "C0402" C0402 192.28,-99.81 r270 bottom
A:C15 "C0603" C0603 292.87,-63.68 r270 bottom
A:C16 "C0402" C0402 238.69,-117.32 r270 bottom
A:C18 "C0402" C0402 -130,-285 r180 bottom
A:C19 "C0402" C0402 -130,15 r0 bottom
A:C20 "C0402" C0402 599.81,138.9 r90 bottom
A:C21 "C0402" C0402 919.81,138.9 r90 bottom
A:C22 "C0402" C0402 599.81,-101.1 r90 bottom
A:C23 "C0402" C0402 919.81,-101.1 r90 bottom
A:C24 "C0402" C0402 1189,87 r0 top
A:C25 "C0402" C0402 578.24,-254.51 r0 bottom
A:C26 "C0402" C0402 950.24,-254.51 r180 bottom
A:C27 "C0402" C0402 578.24,-254.51 r0 top
A:C28 "C0402" C0402 950.24,-254.51 r180 top
A:C31 "C1812" C1812 750,163 r90 bottom
A:D1 "DO-216AA" DO-216AA 228.81,55.67 r180 top
A:D2 "LED0805" LED0805 489.81,203.9 r180 top
A:D3 "LED0805" LED0805 -161.58,-461.1 r180 bottom
A:D4 "LED0805" LED0805 -161.58,-361.1 r180 bottom
A:J1 "CONN_USB_B_MINI_FEMALE" CONN_USB_B_MINI_FEMALE 88.58,68.9 r270 top
A:L1 "L0805" L0805 62.28,-79.81 r270 bottom
A:L2 "L0805" L0805 403.12,-95.18 r180 bottom
A:R1 "R0402" R0402 429.81,113.9 r0 bottom
A:R5 "R0402" R0402 348.94,-211.83 r270 top
A:R6 "R0402" R0402 230.24,-166.51 r180 top
A:R7 "R0402" R0402 395.23,-374.7 r90 top
A:R8 "R0402" R0402 463.42,-486.1 r0 top
A:R9 "R0402" R0402 463.42,-586.1 r0 top
A:R10 "R0402" R0402 117.28,35.19 r90 bottom
A:R11 "R0402" R0402 -109,-454 r90 top
A:R12 "R0402" R0402 -111.58,-361.1 r90 top
A:R13 "R0402" R0402 2.44,-369.33 r0 top
A:R14 "R0402" R0402 337.56,-639.81 r0 top
A:R15 "R0402" R0402 113.42,-536.1 r0 top
A:R16 "R0402" R0402 213.42,-536.1 r0 top
A:R17 "R0402" R0402 1046,125 r90 top
A:SW1 "SW_2POS_CTS218" SW_2POS_CTS218 1483.88,97.64 r0 top
A:TP1 "VIA_20_40" VIA_20_40 -200,-650 r90 top
A:TP2 "VIA_20_40" VIA_20_40 -100,-650 r90 top
A:U1 "SOT-23-5" SOT-23-5 449.81,63.9 r0 top
A:U2 "SOT-553-5" SOT-553-5 -100,85 r90 bottom
A:U4 "QFN-64" QFN-64 230.19,-431.1 r270 bottom
A:U5 "SOIC-8" SOIC-8 220.83,-396.1 r0 top
A:U6 "SOIC-8" SOIC-8 759.81,138.9 r0 top
A:U7 "SOIC-8" SOIC-8 759.81,-101.1 r0 top
A:U8 "SOIC-8" SOIC-8 754.81,-331.1 r180 bottom
A:U9 "TSSOP20_PW" TSSOP20_PW 1156.06,-71.1 r0 top
A:U10 "SOIC-8" SOIC-8 755,-331.1 r0 top
A:X1 "OSC_ECS-120-20-30B" OSC_ECS-120-20-30B -130,-130 r90 bottom
C1 "C0402" C0402 2461.54,63.46 r90 bottom
C2 "C0402" C0402 2385,-381 r0 top
C3 "C0402" C0402 2400,-230 r270 bottom
C4 "C0402" C0402 2385,-657 r0 top
C5 "C0402" C0402 2425,-510 r0 bottom
C6 "C0402" C0402 3251.54,28.46 r180 bottom
C7 "C0402" C0402 2061.54,-421.54 r180 top
C8 "C0402" C0402 2066.54,-716.54 r0 top
C9 "C0402" C0402 918.95,-869.84 r270 bottom
C10 "C0402" C0402 206.54,-1041.54 r270 bottom
C11 "C0402" C0402 491.54,-1041.54 r270 bottom
C12 "C0402" C0402 771.54,-1046.54 r270 bottom
C13 "C0402" C0402 1505,-776 r180 bottom
C14 "C0805" C0805 1028,-956 r0 bottom
C15 "C0805" C0805 1450,-1295 r90 bottom
C16 "C0805" C0805 1030,-855 r0 bottom
C17 "C0805" C0805 1300,-1295 r90 bottom
C18 "C0603" C0603 101.54,-1186.54 r270 bottom
C19 "C0603" C0603 171.54,-1186.54 r270 bottom
C20 "C0603" C0603 171.54,-1006.54 r270 top
C21 "C0603" C0603 96.54,-1006.54 r270 top
C22 "C0603" C0603 241.54,-1186.54 r270 bottom
C23 "C0603" C0603 316.54,-1186.54 r270 bottom
C24 "C0603" C0603 316.54,-1006.54 r270 top
C25 "C0603" C0603 241.54,-1006.54 r270 top
C26 "C0603" C0603 381.54,-1186.54 r270 bottom
C27 "C0603" C0603 456.54,-1186.54 r270 bottom
C28 "C0603" C0603 456.54,-1006.54 r270 top
C29 "C0603" C0603 386.54,-1006.54 r270 top
C30 "C0603" C0603 521.54,-1186.54 r270 bottom
C31 "C0603" C0603 596.54,-1186.54 r270 bottom
C32 "C0603" C0603 596.54,-1006.54 r270 top
C33 "C0603" C0603 526.54,-1006.54 r270 top
C34 "C0603" C0603 661.54,-1186.54 r270 bottom
C35 "C0603" C0603 736.54,-1186.54 r270 bottom
C36 "C0603" C0603 736.54,-1006.54 r270 top
C37 "C0603" C0603 661.54,-1006.54 r270 top
C38 "C0603" C0603 806.54,-1186.54 r270 bottom
C39 "C0603" C0603 881.54,-1186.54 r270 bottom
C40 "C0603" C0603 881.54,-1006.54 r270 top
C41 "C0603" C0603 806.54,-1006.54 r270 top
C42 "C0402" C0402 1013,-1197 r270 bottom
C43 "C0603" C0603 954,-1214 r270 bottom
C44 "C0402" C0402 1505,-823 r180 bottom
C45 "C0402" C0402 1165,-1220 r90 bottom
C46 "C0402" C0402 1013,-1071 r0 bottom
C47 "C0402" C0402 943,-1066 r90 bottom
C48 "C0805" C0805 3216.29,-586.54 r180 top
C49 "C0402" C0402 1535,-990 r0 bottom
C50 "C0402" C0402 1504.48,-657 r0 bottom
C51 "C0402" C0402 1504.48,-706.5 r0 bottom
C52 "C0402" C0402 1564.9,-737.48 r90 bottom
C53 "C0402" C0402 1270,-365 r90 bottom
C54 "C0402" C0402 1651.54,-736.54 r90 bottom
C55 "C0402" C0402 1696.54,-736.54 r90 bottom
C56 "C0402" C0402 1676.54,-671.54 r180 bottom
C57 "C0402" C0402 1925,-935 r270 bottom
C58 "C0402" C0402 1890,-350 r0 bottom
C59 "C0402" C0402 1676.54,-536.54 r180 bottom
C60 "C0402" C0402 1611.54,-556.54 r270 bottom
C61 "C0402" C0402 1571.54,-556.54 r270 bottom
C62 "C0402" C0402 1531.54,-556.54 r270 bottom
C63 "C0402" C0402 1491.54,-556.54 r270 bottom
C64 "C0402" C0402 1476.3,-616.98 r0 bottom
C65 "C0402" C0402 3516.54,-866.54 r270 top
C66 "C0805" C0805 3436.54,-841.54 r270 top
C67 "C0402" C0402 3140,-1095 r0 top
C68 "C0402" C0402 3126.54,-955.48 r90 top
C69 "C0402" C0402 3340.54,-1259.48 r180 top
C70 "C0805" C0805 3217.54,-1259.48 r0 top
C71 "C0805" C0805 1426.54,-206.54 r90 bottom
C72 "C0603" C0603 1241.54,-686.54 r270 bottom
C73 "C0603" C0603 1606.54,-206.54 r270 bottom
C74 "C0805" C0805 2288,-362 r90 top
C75 "C0603" C0603 1976.54,-916.54 r270 bottom
C76 "C0402" C0402 2021.54,-431.54 r180 bottom
C77 "C0402" C0402 2021.54,-386.54 r180 bottom
C78 "C0402" C0402 1581.95,-869.84 r90 bottom
C79 "C0402" C0402 1620.95,-869.84 r90 bottom
C80 "C0402" C0402 1392.52,-320 r180 bottom
C81 "C0402" C0402 1251.54,-511.54 r270 bottom
C82 "C0805" C0805 1206.54,-521.54 r270 top
C83 "C0603" C0603 1193.5,-786.5 r0 bottom
C84 "C0402" C0402 1754.53,-1030.47 r180 bottom
C85 "C0402" C0402 1782.54,-664.54 r180 bottom
C86 "C0402" C0402 1851.54,-506.54 r180 bottom
C87 "C0402" C0402 1676.53,-427.52 r270 bottom
C88 "C0402" C0402 1586.54,-421.54 r270 bottom
C89 "C0402" C0402 1381.54,-631.54 r0 bottom
C90 "C0402" C0402 1605.2,-737.48 r270 bottom
C91 "C0805" C0805 2211.54,-241.54 r180 bottom
C92 "C0603" C0603 2041.54,-331.54 r180 bottom
C93 "C1206P" C1206P 2106.54,-66.54 r270 top
C94 "C1206P" C1206P 2216.54,-66.54 r270 top
C95 "C0603" C0603 1981.54,-126.54 r90 top
D1 "DO-216AA" DO-216AA 3596.54,-1011.54 r0 top
D2 "SOD882L" SOD882L 3210,-460 r0 top
D3 "DO-216AA" DO-216AA 2221.54,-1.54 r90 bottom
D4 "TI_DRY_6_(R-PUSON-N6)" TI_DRY_6_(R-PUSON-N6) 1811,39 r0 bottom
J1 "HEADER_HSEC8_180_EDGE" HEADER_HSEC8_180_EDGE 2052.56,-1615.1 r0 top
J2 "HDR1X3_2MM" HDR1X3_2MM 2241.54,-881.54 r270 top
J3 "HDR1X3_2MM" HDR1X3_2MM 2341.54,-881.54 r270 top
J4 "HDR1X3_2MM" HDR1X3_2MM 2441.54,-881.54 r270 top
J5 "HDR1X3_2MM" HDR1X3_2MM 2541.54,-881.54 r270 top
J6 "HDR1X3_2MM" HDR1X3_2MM 2641.54,-881.54 r270 top
J7 "HDR1X3_2MM" HDR1X3_2MM 2741.54,-881.54 r270 top
J8 "CONN_USB_MICROAB_FEMALE" CONN_USB_MICROAB_FEMALE 1790,250 r180 top
J9 "DF40C-60DP-0.4V" DF40C-60DP-0.4V 3902.56,305.19 r0 bottom
L1 "IND_SMD_VLF3010A_COILS" IND_SMD_VLF3010A_COILS 3130,-850 r270 top
L2 "IND_SMD_VLF3010A_COILS" IND_SMD_VLF3010A_COILS 3255,-1125 r0 top
L3 "L0805" L0805 1521.54,-206.54 r270 bottom
L4 "L0805" L0805 2181.54,-361.48 r270 top
L5 "L0805" L0805 1206.54,-696.54 r270 top
L6 "L0805" L0805 2051.54,-241.54 r180 bottom
LD1 "LED0805" LED0805 3279.29,-681.04 r180 top
LD2 "LED0805" LED0805 2413.56,203.9 r90 top
LD3 "LED0805" LED0805 2513.56,203.9 r90 top
R1 "R0402" R0402 1053.54,-58.54 r0 bottom
R2 "R0402" R0402 1053.54,-109.54 r180 bottom
R3 "R0402" R0402 2111.54,-831.54 r0 bottom
R4 "R0402" R0402 2007.03,-713.02 r0 bottom
R5 "R0402" R0402 1891.54,-261.54 r90 top
R6 "R0402" R0402 1756.54,-256.54 r90 top
R7 "R0402" R0402 2007.03,-835.02 r180 bottom
R8 "R0402" R0402 2007.03,-791.02 r180 bottom
R9 "R0402" R0402 1736.54,-1051.54 r90 top
R10 "R0402" R0402 1791.54,-1051.54 r90 top
R11 "R0402" R0402 1981.54,-581.54 r180 bottom
R12 "R0402" R0402 1981.54,-631.54 r180 bottom
R13 "R0402" R0402 2351.54,223.46 r90 top
R14 "R0402" R0402 2576.54,223.46 r90 top
R15 "R0402" R0402 3141.54,-16.54 r90 bottom
R16 "R0402" R0402 3091.54,-16.54 r90 bottom
R17 "R0402" R0402 3396.54,-21.54 r270 bottom
R18 "R0402" R0402 2425,-300 r0 bottom
R19 "R0603" R0603 2435,-605 r0 bottom
R20 "R0402" R0402 2940,-820 r90 bottom
R21 "R0402" R0402 2990,-820 r90 bottom
R22 "R0402" R0402 2940,-945 r90 bottom
R23 "R0402" R0402 2990,-945 r90 bottom
R24 "R0402" R0402 1951.54,-551.54 r270 top
R25 "R0402" R0402 1510,240 r270 bottom
R26 "R0402" R0402 1525,-40 r270 bottom
R27 "R0603" R0603 150,-1390 r90 top
R28 "R0603" R0603 215,-1390 r90 top
R29 "R0603" R0603 280,-1390 r90 top
R30 "R0603" R0603 345,-1390 r90 top
R31 "R0603" R0603 410,-1390 r90 top
R32 "R0603" R0603 475,-1390 r90 top
R33 "R0603" R0603 115,-1390 r90 bottom
R34 "R0603" R0603 180,-1390 r90 bottom
R35 "R0603" R0603 245,-1390 r90 bottom
R36 "R0603" R0603 310,-1390 r90 bottom
R37 "R0603" R0603 375,-1390 r90 bottom
R38 "R0603" R0603 440,-1390 r90 bottom
R39 "R0603" R0603 540,-1390 r90 top
R40 "R0603" R0603 605,-1390 r90 top
R41 "R0603" R0603 670,-1390 r90 top
R42 "R0603" R0603 735,-1390 r90 top
R43 "R0603" R0603 800,-1390 r90 top
R44 "R0603" R0603 865,-1390 r90 top
R45 "R0603" R0603 505,-1390 r90 bottom
R46 "R0603" R0603 570,-1390 r90 bottom
R47 "R0603" R0603 635,-1390 r90 bottom
R48 "R0603" R0603 700,-1390 r90 bottom
R49 "R0603" R0603 765,-1390 r90 bottom
R50 "R0603" R0603 830,-1390 r90 bottom
R51 "R0603" R0603 1180,-955 r0 bottom
R52 "R0603" R0603 1450,-1140 r90 bottom
R53 "R0603" R0603 1180,-860 r0 bottom
R54 "R0603" R0603 1300,-1140 r90 bottom
R55 "R0402" R0402 1350,-1020 r90 bottom
R56 "R0402" R0402 1450,-1020 r270 bottom
R57 "R0402" R0402 1400,-1020 r90 bottom
R58 "R0402" R0402 1300,-1020 r270 bottom
R59 "R0603" R0603 1090,-1257 r270 bottom
R60 "R0603" R0603 1124,-1141 r180 bottom
R61 "R0603" R0603 1124,-1071 r180 bottom
R62 "R0805" R0805 3596.54,-841.54 r270 top
R63 "R0402" R0402 3161.54,-667.48 r270 bottom
R64 "R0402" R0402 3183.54,-955.48 r270 top
R65 "R0402" R0402 3140,-1045 r0 top
R66 "R0402" R0402 3305,-768 r270 top
R67 "R0402" R0402 3153.29,-681.04 r0 top
R68 "R0402" R0402 3333,-843 r0 top
R69 "R0402" R0402 3436.54,-968.48 r90 top
R70 "R0402" R0402 3355,-770 r90 top
R71 "R0603" R0603 3436.54,-1081.48 r270 top
R72 "R0402" R0402 3340.54,-1220.48 r0 top
R73 "R0402" R0402 3380.54,-1179.48 r0 top
R74 "R0603" R0603 1488.54,-244.48 r180 top
R75 "R0603" R0603 1181.54,-491.54 r270 bottom
R76 "R0402" R0402 1826.54,38.46 r90 top
R77 "R0402" R0402 1776.54,38.46 r90 top
R78 "R0402" R0402 2188.07,166.93 r90 bottom
R79 "R0402" R0402 1707,111 r180 bottom
R80 "R0402" R0402 1721.54,38.46 r270 bottom
R81 "R0402" R0402 2101.54,248.46 r0 top
R82 "R0402" R0402 1721.54,38.46 r90 top
R83 "R0603" R0603 2341,-36 r90 bottom
R84 "R0603" R0603 2258.07,151.93 r90 bottom
R85 "R0603" R0603 2011.54,33.46 r90 top
R86 "R0603" R0603 2126.54,148.46 r270 top
SW1 "SW_2POS_CTS218" SW_2POS_CTS218 2963.46,-883.46 r180 top
SW2 "SWITCH_CAS-D20TA" SWITCH_CAS-D20TA 1600,-1200 r0 top
SW3 "SWITCH_CAS-D20TA" SWITCH_CAS-D20TA 1325,-1200 r0 top
TP1 "VIA_20_40" VIA_20_40 2081.54,-971.54 r0 top
TP2 "VIA_20_40" VIA_20_40 2233.96,-508.25 r0 top
TP3 "VIA_20_40" VIA_20_40 2535,-605 r180 top
TP4 "VIA_20_40" VIA_20_40 3701.54,-1001.54 r0 top
TP5 "VIA_20_40" VIA_20_40 -200,-850 r270 top
TP6 "VIA_20_40" VIA_20_40 3320.54,-1312.48 r0 top
TP7 "VIA_20_40" VIA_20_40 -100,-850 r270 top
U1 "TI_ZWT_337BGA" TI_ZWT_337BGA 1600,-650 r0 top
U2 "SOT-23-6" SOT-23-6 2463.56,23.9 r0 top
U3 "SOT-23-6" SOT-23-6 2405,-265 r180 top
U4 "SOT-23-6" SOT-23-6 2405,-555 r180 top
U5 "CONN_SDMICRO-3M-2900" CONN_SDMICRO-3M-2900 3100,95 r0 top
U6 "SOT-23-6" SOT-23-6 135,-1170 r0 top
U7 "SOT-23-6" SOT-23-6 280,-1170 r0 top
U8 "SOT-23-6" SOT-23-6 420,-1170 r0 top
U9 "SOT-23-6" SOT-23-6 560,-1170 r0 top
U10 "SOT-23-6" SOT-23-6 700,-1170 r0 top
U11 "SOT-23-6" SOT-23-6 845,-1170 r0 top
U12 "MSOP8_DGK" MSOP8_DGK 1075,-1150 r270 top
U13 "SSOP16_DBQ" SSOP16_DBQ 1100,-950 r270 top
U14 "TI_DRC_10" TI_DRC_10 3295,-955 r0 top
U15 "SOT-23-5" SOT-23-5 2241.54,148.46 r90 top
U16 "SC-75" SC-75 2031.54,163.46 r0 top
X1 "XTAL_TXC_7B" XTAL_TXC_7B 2061.54,-571.54 r270 top

## Footprints (in the part's own frame and the unit in brackets; to place one, negate y for a bottom-side part, rotate by r counter-clockwise, add the part's x,y. Pads: shape width x height; smd on the part's side, far side on the other; paste and mask are expansions set on the pad)
C0402 [mil]
  rect 25x25 smd mask+3: 1(-20,0) 2(20,0)
  silkscreen extent -40,-20 40,20
C0603 [mil]
  rect 43x39 smd mask+3: 1(-33.5,0) 2(33.5,0)
  silkscreen extent -65,-28 65,28
C0805 [mil]
  rect 51x59 smd mask+3: 1(-37.5,0) 2(37.5,0)
  silkscreen extent -78,-45 78,45
C0805P [mil]
  rect 51x59 smd mask+3: 1(-37.5,0) 2(37.5,0)
  silkscreen extent -70,-35 70,35
C1206P [mil]
  rect 63x71 smd mask+3: 1(-55,0) 2(55,0)
  silkscreen extent -95,-45 95,45
C1812 [mil]
  rect 125x45 smd mask+3: 1(0,80) 2(0,-80)
  silkscreen extent -75,-115 75,115
CONN_SDMICRO-3M-2900 [mil]
  rect 32x59 smd mask+2.5: 1(0,0) 2(43,-16) 3(86,0) 4(129,8) 5(172,0) 6(215,8) 7(258,0) 8(301,0)
  rect 55x76 smd mask+3: 9(332.5,112.5) 10(-185.5,151.5)
  rect 76x55 smd mask+3: 11(42,-406) 12(267,-406)
  silkscreen extent -225,-445 370,200
CONN_USB_B_MINI_FEMALE [mil]
  rect 20x80 smd mask+3: 1(-62.99,0) 2(-31.5,0) 3(0,0) 4(31.5,0) 5(62.99,0)
  rect 100x88 smd mask+3: 6(-165.35,-9.84) 7(165.35,-9.84) 8(-165.35,-218.5) 9(165.35,-218.5)
  round 1 hole 36 unplated mask+27: 10(-68.9,-88.58) 11(68.9,-88.58)
  silkscreen extent -152,-343 152,50
CONN_USB_MICROAB_FEMALE [mm]
  rect 0.4x1.35 smd mask+0.025: 1(-1.3,2.7) 2(-0.65,2.7) 3(0,2.7) 4(0.65,2.7) 5(1.3,2.7)
  rect 1.5x1.3 smd mask+0.05: 6(3.3,2.6) 7(-3.3,2.6)
  rect 2.3x1.3 smd mask+0.05: 8(3.75,0) 9(-3.75,0)
  rect 1.9x1.9 smd mask+0.05: 10(-1.2,0) 11(1.2,0)
  silkscreen extent -3.8,-2.2 3.8,-1.37
DF40C-60DP-0.4V [mm]
  rect 0.2x1.14 smd mask+0.1: 1(-71.205,6.4) 2(-71.205,3.76) 3(-70.805,6.4) 4(-70.805,3.76) 5(-70.405,6.4) 6(-70.405,3.76) 7(-70.005,6.4) 8(-70.005,3.76) 9(-69.605,6.4) 10(-69.605,3.76) 11(-69.205,6.4) 12(-69.205,3.76) 13(-68.805,6.4) 14(-68.805,3.76) 15(-68.405,6.4) 16(-68.405,3.76) 17(-68.005,6.4) 18(-68.005,3.76) 19(-67.605,6.4) 20(-67.605,3.76) 21(-67.205,6.4) 22(-67.205,3.76) 23(-66.805,6.4) 24(-66.805,3.76) 25(-66.405,6.4) 26(-66.405,3.76) 27(-66.005,6.4) 28(-66.005,3.76) 29(-65.605,6.4) 30(-65.605,3.76) 31(-65.205,6.4) 32(-65.205,3.76) 33(-64.805,6.4) 34(-64.805,3.76) 35(-64.405,6.4) 36(-64.405,3.76) 37(-64.005,6.4) 38(-64.005,3.76) 39(-63.605,6.4) 40(-63.605,3.76) 41(-63.205,6.4) 42(-63.205,3.76) 43(-62.805,6.4) 44(-62.805,3.76) 45(-62.405,6.4) 46(-62.405,3.76) 47(-62.005,6.4) 48(-62.005,3.76) 49(-61.605,6.4) 50(-61.605,3.76) 51(-61.205,6.4) 52(-61.205,3.76) 53(-60.805,6.4) 54(-60.805,3.76) 55(-60.405,6.4) 56(-60.405,3.76) 57(-60.005,6.4) 58(-60.005,3.76) 59(-59.605,6.4) 60(-59.605,3.76)
  round 0.127 hole 2.489 unplated mask+2.222: 61(-73.66,21.59) 62(-29.21,3.175) 63(-6.35,19.05)
  silkscreen extent -72.71,2.88 -58.1,7.28
DO-216AA [mil]
  rect 100x105 smd mask+3: 1(0,12.5)
  rect 50x40 smd mask+3: 2(0,-90)
  silkscreen extent -60,-120 60,75
HDR1X3_2MM [mil]
  rect 62x62 / inner round 62 / far side rect 62x62 hole 42 mask+3: 1(0,0)
  round 62 hole 42 mask+3: 2(78.74,0) 3(157.48,0)
  silkscreen extent -50,-50 200,50
HEADER_HSEC8_180_EDGE [mm]
  rect 0.5x2.724 smd: 1(-50.4,0) 3(-49.6,0) 5(-48.8,0) 7(-48,0) 9(-47.2,0) 11(-46.4,0) 13(-45.6,0) 15(-44.8,0) 17(-44,0) 19(-43.2,0) 21(-42.4,0) 23(-41.6,0) 25(-40.8,0) 27(-40,0) 29(-39.2,0) 31(-38.4,0) 33(-37.6,0) 35(-36.8,0) 37(-36,0) 39(-35.2,0) 41(-34.4,0) 43(-33.6,0) 45(-32.8,0) 47(-32,0) 49(-31.2,0) 51(-30.4,0) 53(-29.6,0) 55(-28.8,0) 57(-24.8,0) 59(-24,0) 61(-23.2,0) 63(-22.4,0) 65(-21.6,0) 67(-20.8,0) 69(-20,0) 71(-19.2,0) 73(-18.4,0) 75(-17.6,0) 77(-16.8,0) 79(-16,0) 81(-15.2,0) 83(-14.4,0) 85(-13.6,0) 87(-12.8,0) 89(-12,0) 91(-11.2,0) 93(-10.4,0) 95(-9.6,0) 97(-8.8,0) 99(-8,0) 101(-7.2,0) 103(-6.4,0) 105(-5.6,0) 107(-4.8,0) 109(-4,0) 111(-3.2,0) 113(-2.4,0) 115(-1.6,0) 117(-0.8,0) 119(0,0) 121(21.068,0) 123(21.868,0) 125(22.668,0) 127(23.468,0) 129(24.268,0) 131(25.068,0) 133(25.868,0) 135(26.668,0) 137(27.468,0) 139(28.268,0) 141(29.068,0) 143(29.868,0) 145(30.668,0) 147(31.468,0) 149(32.268,0) 151(33.068,0) 153(33.868,0) 155(34.668,0) 157(35.468,0) 159(36.268,0) 161(37.068,0) 163(37.868,0) 165(38.668,0) 167(39.468,0) 169(40.268,0) 171(41.068,0) 173(41.868,0) 175(42.668,0) 177(43.468,0) 179(44.268,0)
  rect 0.5x2.724 smd far side: 2(-50.4,0) 4(-49.6,0) 6(-48.8,0) 8(-48,0) 10(-47.2,0) 12(-46.4,0) 14(-45.6,0) 16(-44.8,0) 18(-44,0) 20(-43.2,0) 22(-42.4,0) 24(-41.599,0) 26(-40.8,0) 28(-40,0) 30(-39.2,0) 32(-38.4,0) 34(-37.598,0) 36(-36.798,0) 38(-35.998,0) 40(-35.198,0) 42(-34.398,0) 44(-33.6,0) 46(-32.798,0) 48(-32,0) 50(-31.198,0) 52(-30.398,0) 54(-29.597,0) 56(-28.8,0) 58(-24.8,0) 60(-24,0) 62(-23.2,0) 64(-22.4,0) 66(-21.6,0) 68(-20.8,0) 70(-20,0) 72(-19.2,0) 74(-18.4,0) 76(-17.599,0) 78(-16.799,0) 80(-15.999,0) 82(-15.199,0) 84(-14.399,0) 86(-13.599,0) 88(-12.799,0) 90(-11.999,0) 92(-11.199,0) 94(-10.399,0) 96(-9.598,0) 98(-8.798,0) 100(-7.998,0) 102(-7.198,0) 104(-6.398,0) 106(-5.598,0) 108(-4.798,0) 110(-3.998,0) 112(-3.198,0) 114(-2.398,0) 116(-1.597,0) 118(-0.797,0) 120(0.003,0) 122(21.068,0) 124(21.868,0) 126(22.668,0) 128(23.468,0) 130(24.268,0) 132(25.068,0) 134(25.869,0) 136(26.669,0) 138(27.469,0) 140(28.269,0) 142(29.069,0) 144(29.869,0) 146(30.669,0) 148(31.469,0) 150(32.269,0) 152(33.069,0) 154(33.87,0) 156(34.67,0) 158(35.47,0) 160(36.27,0) 162(37.07,0) 164(37.87,0) 166(38.67,0) 168(39.47,0) 170(40.27,0) 172(41.07,0) 174(41.871,0) 176(42.671,0) 178(43.471,0) 180(44.271,0)
IND_SMD_VLF3010A_COILS [mil]
  rect 48x26 smd mask+3: 1(0,54.13) 2(0,-54.13)
  silkscreen extent -55,-63 55,63
L0805 [mil]
  rect 51x59 smd mask+3: 1(-37.5,0) 2(37.5,0)
  silkscreen extent -75,-40 75,40
LED0805 [mil]
  rect 51x59 smd mask+3: 1(-37.5,0) 2(37.5,0)
  silkscreen extent -99,-35 70,35
MSOP8_DGK [mil]
  rect 16x40 smd mask+3: 1(-38.4,-90) 2(-12.8,-90) 3(12.8,-90) 4(38.4,-90) 5(38.4,90) 6(12.8,90) 7(-12.8,90) 8(-38.4,90)
  silkscreen extent -60,-60 60,60
OSC_ECS-120-20-30B [mil]
  rect 63x50 smd mask+3: 1(-72.83,-43.3) 2(72.83,-43.3) 3(72.83,43.3) 4(-72.83,43.3)
  silkscreen extent -123,-108 122,92
QFN-64 [mil]
  rect 55x12 smd mask+2: 1(-222.5,147.67) 2(-222.5,127.99) 3(-222.5,108.29) 4(-222.5,88.6) 5(-222.5,68.92) 6(-222.5,49.22) 7(-222.5,29.53) 8(-222.5,9.85) 9(-222.5,-9.85) 10(-222.5,-29.53) 11(-222.5,-49.22) 12(-222.5,-68.92) 13(-222.5,-88.6) 14(-222.5,-108.3) 15(-222.5,-127.99) 16(-222.5,-147.67) 33(222.5,-147.67) 34(222.5,-127.99) 35(222.5,-108.3) 36(222.5,-88.6) 37(222.5,-68.92) 38(222.5,-49.22) 39(222.5,-29.53) 40(222.5,-9.85) 41(222.5,9.85) 42(222.5,29.53) 43(222.5,49.22) 44(222.5,68.92) 45(222.5,88.6) 46(222.5,108.29) 47(222.5,127.99) 48(222.5,147.67)
  rect 12x55 smd mask+2: 17(-147.67,-222.5) 18(-127.99,-222.5) 19(-108.29,-222.5) 20(-88.6,-222.5) 21(-68.92,-222.5) 22(-49.22,-222.5) 23(-29.53,-222.5) 24(-9.85,-222.5) 25(9.85,-222.5) 26(29.53,-222.5) 27(49.22,-222.5) 28(68.92,-222.5) 29(88.6,-222.5) 30(108.29,-222.5) 31(127.99,-222.5) 32(147.67,-222.5) 49(147.67,222.5) 50(127.99,222.5) 51(108.29,222.5) 52(88.6,222.5) 53(68.92,222.5) 54(49.22,222.5) 55(29.53,222.5) 56(9.85,222.5) 57(-9.85,222.5) 58(-29.53,222.5) 59(-49.22,222.5) 60(-68.92,222.5) 61(-88.6,222.5) 62(-108.29,222.5) 63(-127.99,222.5) 64(-147.67,222.5)
  silkscreen extent -221,-197 197,221
R0402 [mil]
  rect 25x25 smd mask+3: 1(-20,0) 2(20,0)
  silkscreen extent -40,-20 40,20
R0603 [mil]
  rect 43x39 smd mask+3: 1(-33.5,0) 2(33.5,0)
  silkscreen extent -67,-31 67,31
R0805 [mil]
  rect 50x60 smd mask+3: 1(-45,0) 2(45,0)
  silkscreen extent -80,-40 80,40
SC-75 [mm]
  rect 0.4x0.8 smd mask+0.05: 1(-0.5,-0.7) 2(0.5,-0.7) 3(0,0.7)
  silkscreen extent -0.89,-1.3 0.89,1.3
SOD882L [mil]
  rrect0% 22x22 smd mask+3: 1(-18,0) 2(18,0)
  silkscreen extent -50,-20 40,20
SOIC-8 [mil]
  rect 65x26 smd mask+3: 1(-100,75) 2(-100,25) 3(-100,-25) 4(-100,-75) 5(100,-75) 6(100,-25) 7(100,25) 8(100,75)
  silkscreen extent -50,-100 50,100
SOT-23-5 [mil]
  rect 27x39 smd mask+3: 1(-37.4,-51) 2(0,-51) 3(37.4,-51) 4(37.4,51) 5(-37.4,51)
  silkscreen extent -62,-28 65,28
SOT-23-6 [mil]
  rect 27x39 smd mask+3.5: 1(-37.4,-51) 2(0,-51) 3(37.4,-51) 4(37.4,51) 5(0,51) 6(-37.4,51)
  silkscreen extent -62,-28 62,28
SOT-553-5 [mil]
  rect 12x30 smd mask+2: 1(19.69,28) 2(0,28) 3(-19.69,28) 4(-19.69,-28) 5(19.69,-28)
  silkscreen extent -36,-25 36,25
SSOP16_DBQ [mil]
  rect 16x65 smd mask+3: 1(-87.5,-120) 2(-62.5,-120) 3(-37.5,-120) 4(-12.5,-120) 5(12.5,-120) 6(37.5,-120) 7(62.5,-120) 8(87.5,-120) 9(87.5,120) 10(62.5,120) 11(37.5,120) 12(12.5,120) 13(-12.5,120) 14(-37.5,120) 15(-62.5,120) 16(-87.5,120)
  silkscreen extent -100,-75 100,75
SW_2POS_CTS218 [mil]
  rect 30x50 smd mask+3: 1(-25,-150) 2(25,-150) 3(25,150) 4(-25,150)
  silkscreen extent -75,-115 75,115
SWITCH_CAS-D20TA [mil]
  rect 30x65 smd mask+3: 1(-68.9,-72.83) 2(0,-72.83) 3(68.9,-72.83) 4(-68.9,72.83) 5(0,72.83) 6(68.9,72.83)
  silkscreen extent -109,-115 109,115
TI_DRC_10 [mm]
  oval 0.8x0.23 smd paste+0 mask+0.076: 1(1.475,-1) 2(1.475,-0.5) 3(1.475,0) 4(1.475,0.5) 5(1.475,1) 6(-1.475,1) 7(-1.475,0.5) 8(-1.475,0) 9(-1.475,-0.5) 10(-1.475,-1)
  round 0 all layers, no hole: 11(0,0) 12(0,0) 13(0,0) 14(0,0)
  rect 0.28x0.8 smd paste-0.15: 15(-0.25,-1.5) 16(0.25,-1.5) 17(0.25,1.5) 18(-0.25,1.5)
  rect 1.651x2.413 / inner round 0.762 / far side rect 1.651x2.413 hole 0.305: 19(0,0)
  round 0.508 hole 0.305: 20(-0.5,0.75) 21(0.5,0.75) 22(-0.5,-0.75) 23(0.5,-0.75)
  silkscreen extent -2.03,-2.03 2.03,2.03
TI_DRY_6_(R-PUSON-N6) [mm]
  rect 0.3x0.49 smd mask+0.04: 1(-0.5,-0.375) 2(0,-0.375) 3(0.5,-0.375) 4(0.5,0.375) 5(0,0.375) 6(-0.5,0.375)
  silkscreen extent -1.21,-0.81 0.84,0.81
TI_ZWT_337BGA [mil]
  round 17 smd mask+3: A1(-283.46,283.46) A2(-251.97,283.46) A3(-220.47,283.46) A4(-188.98,283.46) A5(-157.48,283.46) A6(-125.98,283.46) A7(-94.49,283.46) A8(-62.99,283.46) A9(-31.5,283.46) A10(0,283.46) A11(31.5,283.46) A12(62.99,283.46) A13(94.49,283.46) A14(125.98,283.46) A15(157.48,283.46) A16(188.98,283.46) A17(220.47,283.46) A18(251.97,283.46) A19(283.46,283.46) B1(-283.46,251.97) B2(-251.97,251.97) B3(-220.47,251.97) B4(-188.98,251.97) B5(-157.48,251.97) B6(-125.98,251.97) B7(-94.49,251.97) B8(-62.99,251.97) B9(-31.5,251.97) B10(0,251.97) B11(31.5,251.97) B12(62.99,251.97) B13(94.49,251.97) B14(125.98,251.97) B15(157.48,251.97) B16(188.98,251.97) B17(220.47,251.97) B18(251.97,251.97) B19(283.46,251.97) C1(-283.46,220.47) C2(-251.97,220.47) C3(-220.47,220.47) C4(-188.98,220.47) C5(-157.48,220.47) C6(-125.98,220.47) C7(-94.49,220.47) C8(-62.99,220.47) C9(-31.5,220.47) C10(0,220.47) C11(31.5,220.47) C12(62.99,220.47) C13(94.49,220.47) C14(125.98,220.47) C15(157.48,220.47) C16(188.98,220.47) C17(220.47,220.47) C18(251.97,220.47) C19(283.46,220.47) D1(-283.46,188.98) D2(-251.97,188.98) D3(-220.47,188.98) D4(-188.98,188.98) D5(-157.48,188.98) D6(-125.98,188.98) D7(-94.49,188.98) D8(-62.99,188.98) D9(-31.5,188.98) D10(0,188.98) D11(31.5,188.98) D12(62.99,188.98) D13(94.49,188.98) D14(125.98,188.98) D15(157.48,188.98) D16(188.98,188.98) D17(220.47,188.98) D18(251.97,188.98) D19(283.46,188.98) E1(-283.46,157.48) E2(-251.97,157.48) E3(-220.47,157.48) E4(-188.98,157.48) E5(-157.48,157.48) E6(-125.98,157.48) E7(-94.49,157.48) E8(-62.99,157.48) E9(-31.5,157.48) E10(0,157.48) E11(31.5,157.48) E12(62.99,157.48) E13(94.49,157.48) E14(125.98,157.48) E15(157.48,157.48) E16(188.98,157.48) E17(220.47,157.48) E18(251.97,157.48) E19(283.46,157.48) F1(-283.46,125.98) F2(-251.97,125.98) F3(-220.47,125.98) F4(-188.98,125.98) F5(-157.48,125.98) F6(-125.98,125.98) F7(-94.49,125.98) F8(-62.99,125.98) F9(-31.5,125.98) F10(0,125.98) F11(31.5,125.98) F12(62.99,125.98) F13(94.49,125.98) F14(125.98,125.98) F15(157.48,125.98) F16(188.98,125.98) F17(220.47,125.98) F18(251.97,125.98) F19(283.46,125.98) G1(-283.46,94.49) G2(-251.97,94.49) G3(-220.47,94.49) G4(-188.98,94.49) G5(-157.48,94.49) G6(-125.98,94.49) G14(125.98,94.49) G15(157.48,94.49) G16(188.98,94.49) G17(220.47,94.49) G18(251.97,94.49) G19(283.46,94.49) H1(-283.46,62.99) H2(-251.97,62.99) H3(-220.47,62.99) H4(-188.98,62.99) H5(-157.48,62.99) H6(-125.98,62.99) H8(-62.99,62.99) H9(-31.5,62.99) H10(0,62.99) H11(31.5,62.99) H12(62.99,62.99) H14(125.98,62.99) H15(157.48,62.99) H16(188.98,62.99) H17(220.47,62.99) H18(251.97,62.99) H19(283.46,62.99) J1(-283.46,31.5) J2(-251.97,31.5) J3(-220.47,31.5) J4(-188.98,31.5) J5(-157.48,31.5) J6(-125.98,31.5) J8(-62.99,31.5) J9(-31.5,31.5) J10(0,31.5) J11(31.5,31.5) J12(62.99,31.5) J14(125.98,31.5) J15(157.48,31.5) J16(188.98,31.5) J17(220.47,31.5) J18(251.97,31.5) J19(283.46,31.5) K1(-283.46,0) K2(-251.97,0) K3(-220.47,0) K4(-188.98,0) K5(-157.48,0) K6(-125.98,0) K8(-62.99,0) K9(-31.5,0) K10(0,0) K11(31.5,0) K12(62.99,0) K14(125.98,0) K15(157.48,0) K16(188.98,0) K17(220.47,0) K18(251.97,0) K19(283.46,0) L1(-283.46,-31.5) L2(-251.97,-31.5) L3(-220.47,-31.5) L4(-188.98,-31.5) L5(-157.48,-31.5) L6(-125.98,-31.5) L8(-62.99,-31.5) L9(-31.5,-31.5) L10(0,-31.5) L11(31.5,-31.5) L12(62.99,-31.5) L14(125.98,-31.5) L15(157.48,-31.5) L16(188.98,-31.5) L17(220.47,-31.5) L18(251.97,-31.5) L19(283.46,-31.5) M1(-283.46,-62.99) M2(-251.97,-62.99) M3(-220.47,-62.99) M4(-188.98,-62.99) M5(-157.48,-62.99) M6(-125.98,-62.99) M8(-62.99,-62.99) M9(-31.5,-62.99) M10(0,-62.99) M11(31.5,-62.99) M12(62.99,-62.99) M14(125.98,-62.99) M15(157.48,-62.99) M16(188.98,-62.99) M17(220.47,-62.99) M18(251.97,-62.99) M19(283.46,-62.99) N1(-283.46,-94.49) N2(-251.97,-94.49) N3(-220.47,-94.49) N4(-188.98,-94.49) N5(-157.48,-94.49) N6(-125.98,-94.49) N14(125.98,-94.49) N15(157.48,-94.49) N16(188.98,-94.49) N17(220.47,-94.49) N18(251.97,-94.49) N19(283.46,-94.49) P1(-283.46,-125.98) P2(-251.97,-125.98) P3(-220.47,-125.98) P4(-188.98,-125.98) P5(-157.48,-125.98) P6(-125.98,-125.98) P7(-94.49,-125.98) P8(-62.99,-125.98) P9(-31.5,-125.98) P10(0,-125.98) P11(31.5,-125.98) P12(62.99,-125.98) P13(94.49,-125.98) P14(125.98,-125.98) P15(157.48,-125.98) P16(188.98,-125.98) P17(220.47,-125.98) P18(251.97,-125.98) P19(283.46,-125.98) R1(-283.46,-157.48) R2(-251.97,-157.48) R3(-220.47,-157.48) R4(-188.98,-157.48) R5(-157.48,-157.48) R6(-125.98,-157.48) R7(-94.49,-157.48) R8(-62.99,-157.48) R9(-31.5,-157.48) R10(0,-157.48) R11(31.5,-157.48) R12(62.99,-157.48) R13(94.49,-157.48) R14(125.98,-157.48) R15(157.48,-157.48) R16(188.98,-157.48) R17(220.47,-157.48) R18(251.97,-157.48) R19(283.46,-157.48) T1(-283.46,-188.98) T2(-251.97,-188.98) T3(-220.47,-188.98) T4(-188.98,-188.98) T5(-157.48,-188.98) T6(-125.98,-188.98) T7(-94.49,-188.98) T8(-62.99,-188.98) T9(-31.5,-188.98) T10(0,-188.98) T11(31.5,-188.98) T12(62.99,-188.98) T13(94.49,-188.98) T14(125.98,-188.98) T15(157.48,-188.98) T16(188.98,-188.98) T17(220.47,-188.98) T18(251.97,-188.98) T19(283.46,-188.98) U1(-283.46,-220.47) U2(-251.97,-220.47) U3(-220.47,-220.47) U4(-188.98,-220.47) U5(-157.48,-220.47) U6(-125.98,-220.47) U7(-94.49,-220.47) U8(-62.99,-220.47) U9(-31.5,-220.47) U10(0,-220.47) U11(31.5,-220.47) U12(62.99,-220.47) U13(94.49,-220.47) U14(125.98,-220.47) U15(157.48,-220.47) U16(188.98,-220.47) U17(220.47,-220.47) U18(251.97,-220.47) U19(283.46,-220.47) V1(-283.46,-251.97) V2(-251.97,-251.97) V3(-220.47,-251.97) V4(-188.98,-251.97) V5(-157.48,-251.97) V6(-125.98,-251.97) V7(-94.49,-251.97) V8(-62.99,-251.97) V9(-31.5,-251.97) V10(0,-251.97) V11(31.5,-251.97) V12(62.99,-251.97) V13(94.49,-251.97) V14(125.98,-251.97) V15(157.48,-251.97) V16(188.98,-251.97) V17(220.47,-251.97) V18(251.97,-251.97) V19(283.46,-251.97) W1(-283.46,-283.46) W2(-251.97,-283.46) W3(-220.47,-283.46) W4(-188.98,-283.46) W5(-157.48,-283.46) W6(-125.98,-283.46) W7(-94.49,-283.46) W8(-62.99,-283.46) W9(-31.5,-283.46) W10(0,-283.46) W11(31.5,-283.46) W12(62.99,-283.46) W13(94.49,-283.46) W14(125.98,-283.46) W15(157.48,-283.46) W16(188.98,-283.46) W17(220.47,-283.46) W18(251.97,-283.46) W19(283.46,-283.46)
  silkscreen extent -307,-307 307,307
TSSOP20_PW [mil]
  rect 65x15 smd mask+3: 1(-110,115.16) 2(-110,89.57) 3(-110,63.98) 4(-110,38.39) 5(-110,12.8) 6(-110,-12.8) 7(-110,-38.39) 8(-110,-63.98) 9(-110,-89.57) 10(-110,-115.16) 11(110,-115.16) 12(110,-89.57) 13(110,-63.98) 14(110,-38.39) 15(110,-12.8) 16(110,12.8) 17(110,38.39) 18(110,63.98) 19(110,89.57) 20(110,115.16)
  silkscreen extent -89,-130 89,130
VIA_20_40 [mil]
  round 40 hole 20 mask+3: 1(0,0)
XTAL_TXC_7B [mm]
  rect 1.6x1.27 smd mask+0.076: 1(-2,-1.2) 2(2,-1.2) 3(2,1.2) 4(-2,1.2)
  silkscreen extent -3.53,-2.1 3.1,2.1

## Via types
v1: diameter 18, hole 8, Primary Side to Secondary Side, 1025 vias
v2: diameter 28, hole 10, Primary Side to Secondary Side, 7 vias

## Nets (pads, with @x,y where several pads share a name; then routed paths per layer and width w, separated by ;. In a path a pad name is that pad's centre, name@x,y a point inside that pad or via, vN(x,y) a via of type N, cw(c..) or ccw(c..) an arc to the next point about the centre after c; other vN are vias at no path point)
1: A:C1.1 A:C2.1 A:C3.2 A:C4.1 A:C5.1 A:C6.1 A:C7.1 A:C8.1 A:C9.1 A:C10.1 A:C11.1 A:C12.1 A:C13.1 A:C14.1 A:C15.1 A:C16.1 A:C18.1 A:C19.1 A:C20.1 A:C22.1 A:C25.1 A:C27.1 A:C31.2 A:D2.1 A:J1.4 A:R6.1 A:R9.2 A:R10.2 A:R13.2 A:R14.2 A:TP2.1 A:U1.2 A:U2.4 A:U4.1 A:U4.5 A:U4.10 A:U4.11 A:U4.13 A:U4.15 A:U4.25 A:U4.35 A:U4.47 A:U4.51 A:U5.5 A:U5.7 A:U6.4 A:U7.4 A:U8.5 A:U10.3 A:U10.4 A:X1.2 A:X1.4 | length 2725
  Primary Side w8: A:U6.4@659.81,63.9 A:U6.4@673,63.9
  Primary Side w10: A:C5.1@-151.5,-524 -145.76,-524 v1(-145.76,-578.51) -144.84,-579.43 A:C7.1@-112.96,-579.43 ; v1(-49.76,-426.51) -48,-428.27 -29.76,-428.27 A:C12.1@-17.76,-440.28 ; A:R13.2@22.44,-369.33 49.06,-369.33 v1(50.24,-370.51) ; v1(26.24,37.49) v1@26.33,37.4 ; A:C8.1@131.77,-276.28 160.47,-276.28 v1(162.24,-274.51) ; A:R6.1@250.24,-166.51 298.24,-162.51 v1(298.24,-158.51) A:C6.1@298.24,-186.51 ; v1(274.24,-370.51) 274.83,-371.1 A:U5.7@320.83,-371.1 ; A:U5.5@320.83,-471.1 373.64,-471.1 v1(374.24,-470.51) ; A:C2.1@339.81,40.4 339.81,1.49 v1(342.24,1.49) ; A:R14.2@357.56,-639.81 357.56,-606.44 v1(358,-606) ; A:U1.2@449.81,12.9 A:C1.1@449.81,-36.1 484.64,-36.1 v1(486.24,-34.51) ; v1(474.24,-254.51) 474.69,-254.96 A:C9.1@474.69,-298.23 ; A:C3.2@477.31,-106.1 517.83,-106.1 v1(518.24,-106.51) ; A:R9.2@483.42,-586.1 510.9,-586.1 v1(511,-586) ; A:C10.1@483.42,-536.1 510.9,-536.1 v1(511,-536) ; v1(510.24,65.49) 511.83,63.9 A:C4.1@539.81,63.9 ; v1(558.24,-286.51) A:C27.1@558.24,-254.51 ; v1(638.24,-206.51) 638.24,-176.1 A:U7.4@659.81,-176.1 ; A:U10.4@655,-406.1 654.59,-406.51 v1(606.24,-406.51) 606.24,-366.51 614.24,-358.51 652.59,-358.51 A:U10.3@655,-356.1
  Primary Side w12: A:C11.1@162.56,-639.81 162.56,-600.44 v1(163,-600) ; v1(673,26) A:U6.4@673,63.9
  Primary Side w20: v1@26.33,37.4 A:J1.4@88.58,37.4
  Primary Side w25: v2(526.24,257.49) 527.31,256.42 A:D2.1@527.31,203.9
  Secondary Side w8: A:C20.1@599.81,118.9 606.11,120.19 622.28,120.19 627.28,125.19 627.28,140.19 645.98,158.9 A:C31.2@670,163 ; A:C31.2@667,158.9 A:C31.2@670,163 ; A:C31.2@673,158.9 A:C31.2@670,163 ; A:C31.2@680.8,169.69 A:C31.2@670,163
  Secondary Side w10: v1(-217.76,-58.51) -173.3,-58.51 A:X1.2@-173.3,-57.17 ; v1(-177.76,13.49) -150,13.49 A:C19.1@-150,15 ; v1(-161.76,65.49) -161.76,65.31 A:U2.4@-128,65.31 ; A:C18.1@-110,-285 -79.27,-285 v1(-77.76,-286.51) ; A:X1.4@-86.7,-202.83 -46.08,-202.83 v1(-45.76,-202.51) ; v1(-37.76,-538.51) -36.87,-539.4 A:U4.51@7.69,-539.4 ; v1(54.24,-226.51) 82.51,-226.51 A:U4.1@82.51,-208.6 ; A:U4.47@102.2,-653.6 v1(102.24,-590.51) v1(102.24,-590.51) ; A:C13.1@137.28,-56.31 163.08,-30.51 194.24,-30.51 v1(194.24,-34.51) ; A:U4.5@161.27,-208.6 161.27,-274.51 v1(162.24,-274.51) ; A:C14.1@192.28,-79.81 192.28,-54.51 v1(194.24,-54.51) ; v1(238.24,-70.51) 238.69,-70.96 A:C16.1@238.69,-97.32 ; v1(254.24,-38.51) 292.87,-38.51 A:C15.1@292.87,-30.18 ; A:U4.10@259.72,-208.6 259.72,-242.51 254.24,-247.99 v1(254.24,-262.51) 267.41,-262.51 279.41,-250.51 A:U4.11@279.41,-208.6 ; A:U4.13@318.79,-208.6 318.79,-169.95 v1(334.24,-154.51) ; A:U4.35@338.48,-653.6 338.48,-616 348.48,-606 v1(358,-606) ; A:U4.15@358.17,-208.6 358.17,-250.51 370.17,-262.51 v1(382.24,-262.51) ; A:U4.25@452.69,-440.95 498.95,-440.95 v1(499,-441) ; v1(558.24,-286.51) A:C25.1@558.24,-254.51 ; A:C22.1@599.81,-121.1 626.24,-121.1 638.24,-133.1 v1(638.24,-206.51) ; v1(606.24,-406.51) 606.65,-406.1 A:U8.5@654.81,-406.1
  Secondary Side w20: v1(26.24,37.49) 64.54,37.49 82.24,55.19 A:R10.2@117.28,55.19 ; A:C31.2@667,158.9 v1(667,255) ; v1(673,26) A:C31.2@673,158.9
$$$723: R66.2 R68.1 | length 67.3
  Primary Side w5.3: R66.2@3305,-779 R66.2@3305,-788 3305,-812 3313,-820 R68.1@3313,-843
$$$2265: R55.1 SW2.2 | length 442.4
  Primary Side w5.3: v1(1598.03,-1217.52) 1600,-1219.49 SW2.2@1600,-1272.83
  Inner Layer 3 w5.5: v1(1358.03,-1158.52) 1436.03,-1158.52 1475.03,-1197.52 1578.03,-1197.52 v1(1598.03,-1217.52)
  Secondary Side w5.3: R55.1@1350,-1040 1350,-1096.52 1358.03,-1104.55 v1(1358.03,-1158.52)
$$$2266: R56.1 SW2.5 | length 348.5
  Primary Side w5.3: SW2.5@1600,-1127.17 1600,-1174.49 v1(1603.03,-1177.52)
  Secondary Side w5.3: R56.1@1450,-1000 1478.03,-1000 1513.03,-1035 1580.51,-1035 1603.03,-1057.52 v1(1603.03,-1177.52)
$$$2267: R57.1 SW3.2 | length 316
  Primary Side w5.3: SW3.2@1325,-1272.83 1325,-1194.52 1335,-1184.52 1345.03,-1184.52 1349.03,-1184.52 v1(1350.03,-1185.52)
  Secondary Side w5.3: v1@1350.06,-1185.49 1352,-1185.49 1352,-1188 1364,-1200 1384,-1200 1400,-1184 R57.1@1400,-1040
$$$2268: R58.1 SW3.5 | length 137.5
  Primary Side w5.3: v1(1324,-1068) 1325,-1069 SW3.5@1325,-1127.17
  Secondary Side w5.3: R58.1@1300,-1000 1324,-1024 v1(1324,-1068)
$$$3593: R63.2 U14.4 | length 454.7
  Primary Side w10: U14.4@3353.07,-935.31 3380,-935.31 3390,-925.31 3390,-910 3380,-900 v1(3380,-860)
  Secondary Side w10: R63.2@3161.54,-687.48 3300.06,-687.48 3333.18,-720.6 3333.18,-813.18 v1(3380,-860)
$$$4026: C45.2 U12.5 | length 79.1
  Primary Side w5.3: U12.5@1165,-1188.4 1201.6,-1188.4 v1(1202,-1188)
  Secondary Side w5.3: C45.2@1165,-1200 1189,-1200 1201,-1188 v1(1202,-1188)
$$$4581: LD1.2 R67.2 | length 68.5
  Primary Side w20: R67.2@3173.29,-681.04 LD1.2@3241.79,-681.04
$$$4984: L1.1 U14.6 | length 112.1
  Primary Side w10: L1.1@3184.13,-850 3221.04,-850 3240.54,-869.5 3240.54,-912.02 U14.6@3236.93,-915.63
$$$5084: R69.1 R71.1 U14.2 | length 148.7
  Primary Side w10: U14.2@3353.07,-974.69 3390.04,-974.69 3403.04,-987.69 3435.74,-987.69 R69.1@3436.54,-988.48
  Primary Side w20: R71.1@3436.54,-1047.98 R69.1@3436.54,-988.48
$$$5419: R68.2 R70.1 U14.5 | length 126.5
  Primary Side w5.3: U14.5@3353.07,-915.63 3353.07,-843.07 R68.2@3353,-843 3355,-841 R70.1@3355,-790
$$$5918: C67.2 R65.2 U14.9 | length 186.5
  Primary Side w10: C67.2@3160,-1095 R65.2@3160,-1045 3196.22,-1045 3208.74,-1032.48 3208.74,-980.48 3214.54,-974.69 U14.9@3236.93,-974.69
$$$6116: C69.1 R72.2 R73.1 U14.1 | length 279.6
  Primary Side w10: U14.1@3353.07,-994.37 3360.54,-994.37 R73.1@3360.54,-1179.48 R72.2@3360.54,-1220.48 3360.54,-1216.98 C69.1@3360.54,-1259.48
$$$6167: L2.1 U14.10 | length 84
  Primary Side w12: U14.10@3236.93,-994.37 3236.93,-1027.48 3255,-1045.55 L2.1@3255,-1070.87
$$$10463: J1.1 R1.2 | length 2742
  Primary Side w5.3: v1(16.54,-1371.54) 16.54,-1406.13 68.31,-1457.9 J1.1@68.31,-1615.1
  Inner Layer 8 w5.5: v1(16.54,-1371.54) 16.54,-1353.3 -11.97,-1324.79 -11.97,-913.97 75.53,-826.47 796.03,-826.47 819.5,-803 819.5,-319 852.5,-286 977.55,-286 1019.53,-244.02 1019.53,-40.47 999.53,-20.47 v1(959.53,-20.47)
  Secondary Side w5.3: v1(959.53,-20.47) 1058.54,-20.47 1073.54,-35.47 R1.2@1073.54,-58.54
$$$10464: J1.2 R2.1 | length 2532.3
  Inner Layer 8 w5.5: v1(-3.82,-1390.1) -3.46,-1363.9 -22.97,-1344.39 -22.97,-908.47 70.03,-815.47 791.03,-815.47 808.5,-798 808.5,-313.5 847,-275 971.9,-275 1008.02,-238.88 1008.02,-173.96 v1(994.53,-160.47)
  Secondary Side w5.3: v1(-3.82,-1390.1) 68.31,-1465.1 J1.2@68.31,-1615.1 ; v1(994.53,-160.47) 1009.53,-160.47 1029.53,-140.47 1063.54,-140.47 1073.54,-130.47 R2.1@1073.54,-109.54
$$$11861: C95.2 D3.2 D4.6 J8.1 R80.2 U15.1 | length 1149.4
  Primary Side w5.3: J8.1@1841.18,143.7 1841.18,99.33 v1(1843.03,97.48)
  Primary Side w15: v1(1843.03,97.48) 1862.52,97.48 1888,72 1888,-8 1900,-20 1939.54,-20 ; v1(1939.54,-1.48) 1939.54,-20 ; C95.2@1981.54,-89.04 1939.04,-46.54 1939.54,-46.04 1939.54,-20 ; v1(2131.54,40.52) 2132.04,40.52 2151.04,59.52 2277.54,59.52 2292.54,74.52 U15.1@2292.54,111.06
  Secondary Side w5.3: R80.2@1721.54,18.46 1752.26,18.46 1758.03,24.24 D4.6@1791.32,24.24 1791.32,6.97 1802.32,-4.03 1802.32,-10.31 1817.54,-25.54 1861.98,-25.54 1880.49,-7.03 1880.49,75.97 1858.98,97.48 v1(1843.03,97.48) ; v1(1939.54,-1.48) v1@1940,-1.94
  Secondary Side w15: v1@1940,-1.94 1940,-14 1951,-25 2000.54,-25 2024,-1.54 D3.2@2131.54,-1.54 v1(2131.54,40.52)
$$$12420: R10.2 U1.W15 | length 112.2
  Primary Side w5.3: U1.W15@1757.48,-933.46 v1(1773.23,-949.21) 1773.23,-979.18 1791.54,-997.48 R10.2@1791.54,-1031.54